# Altium PCB hat_PCB.PcbDoc (part 1 of 2)
Units mm, origin at the board's own origin, x right, y up, seen from the top; angles counter-clockwise.
Board outline 64 x 85 mm, 4 copper layers (Top Side, Ground Plane, Power Plane, Bottom Side), stack 0.844 mm thick; 87 components, 68 nets, 317 pads, 94 vias.
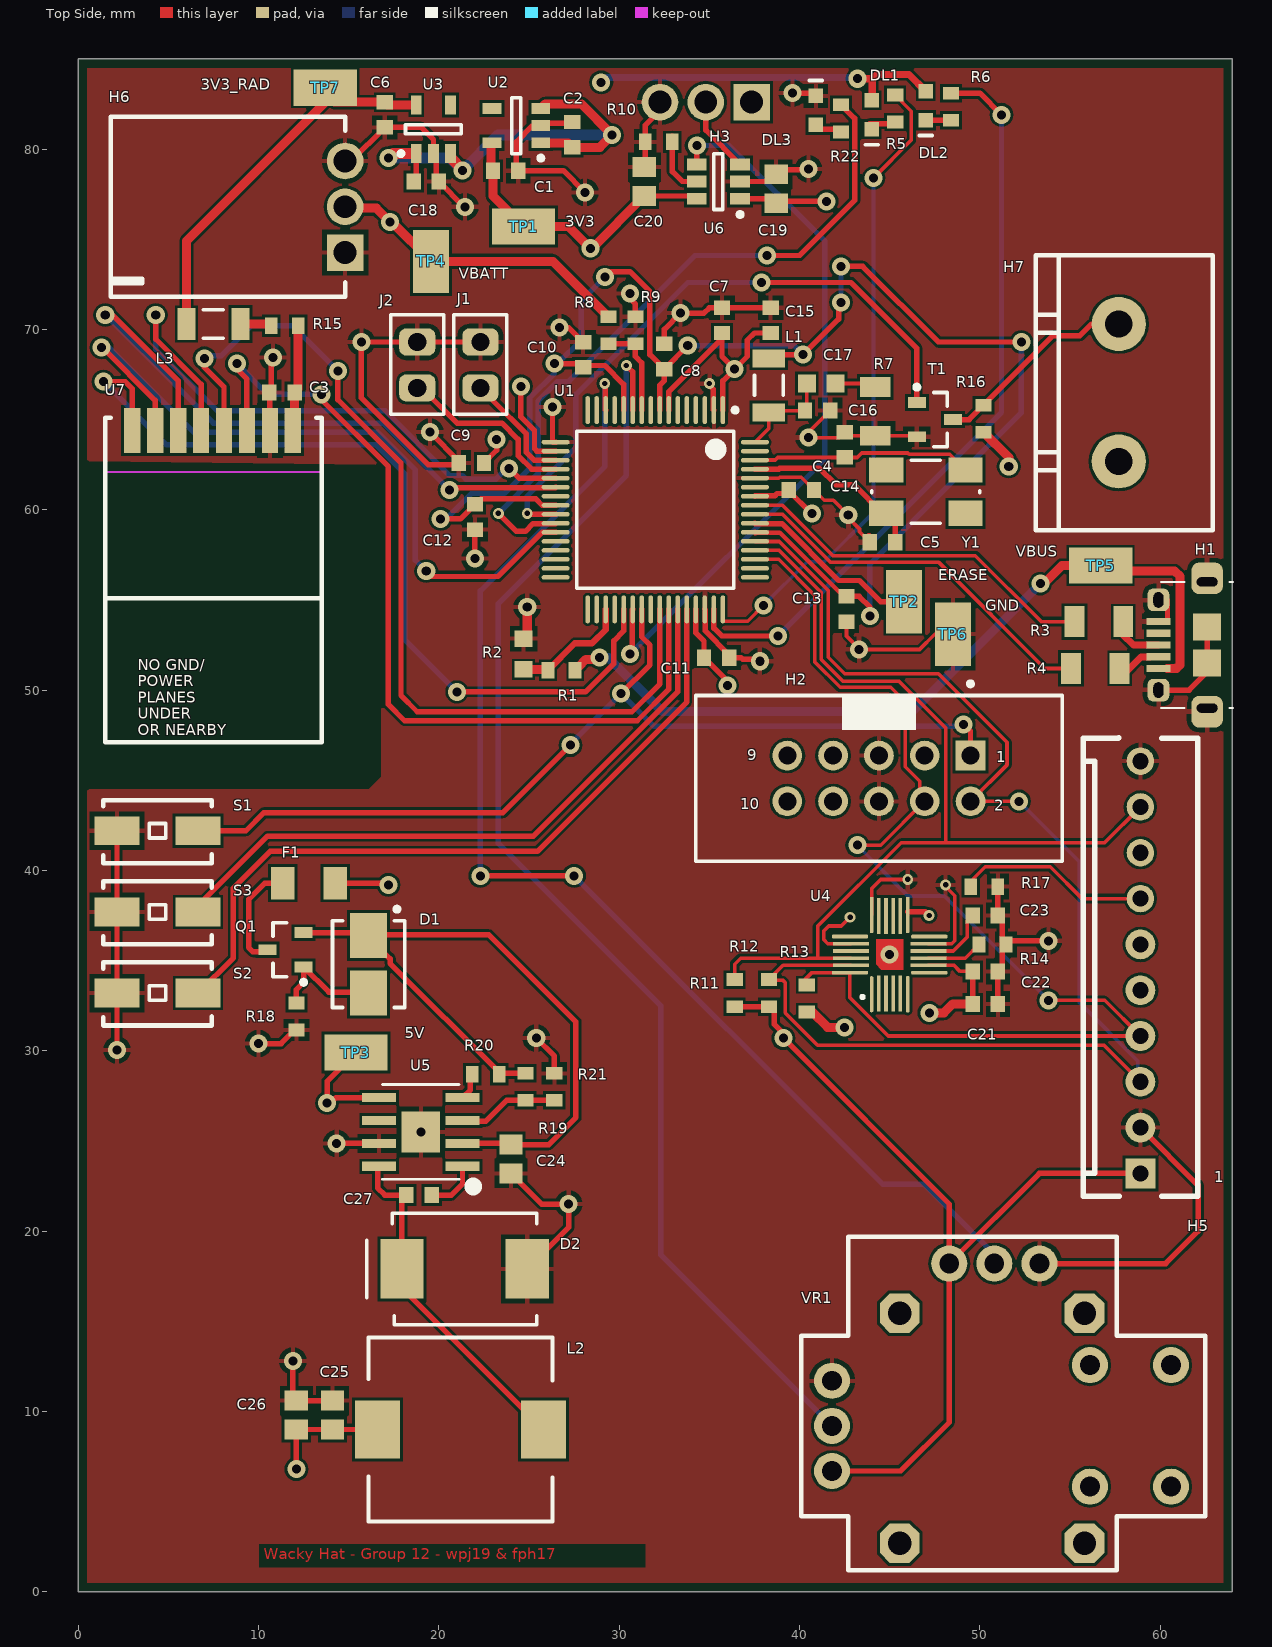
[diagram p0: Top Side view]
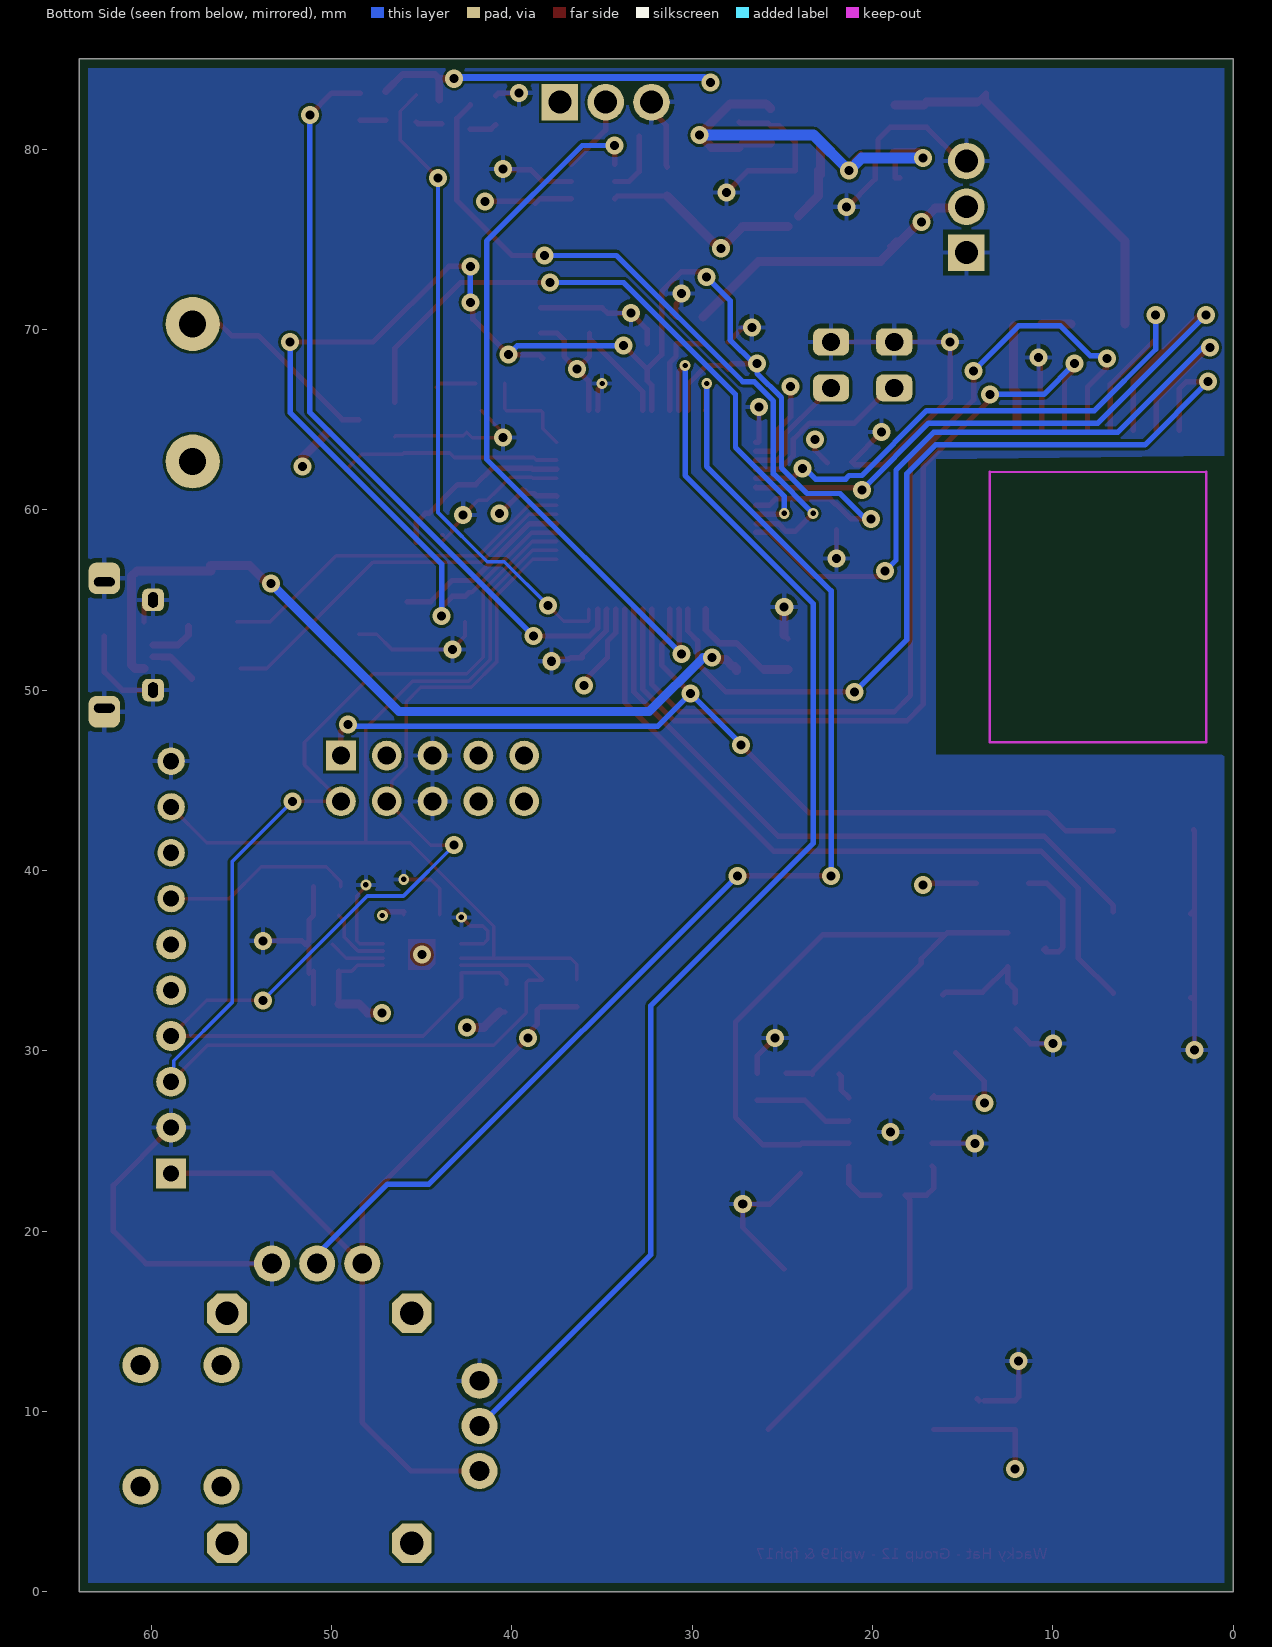
[diagram p1: Bottom Side view, seen from below]
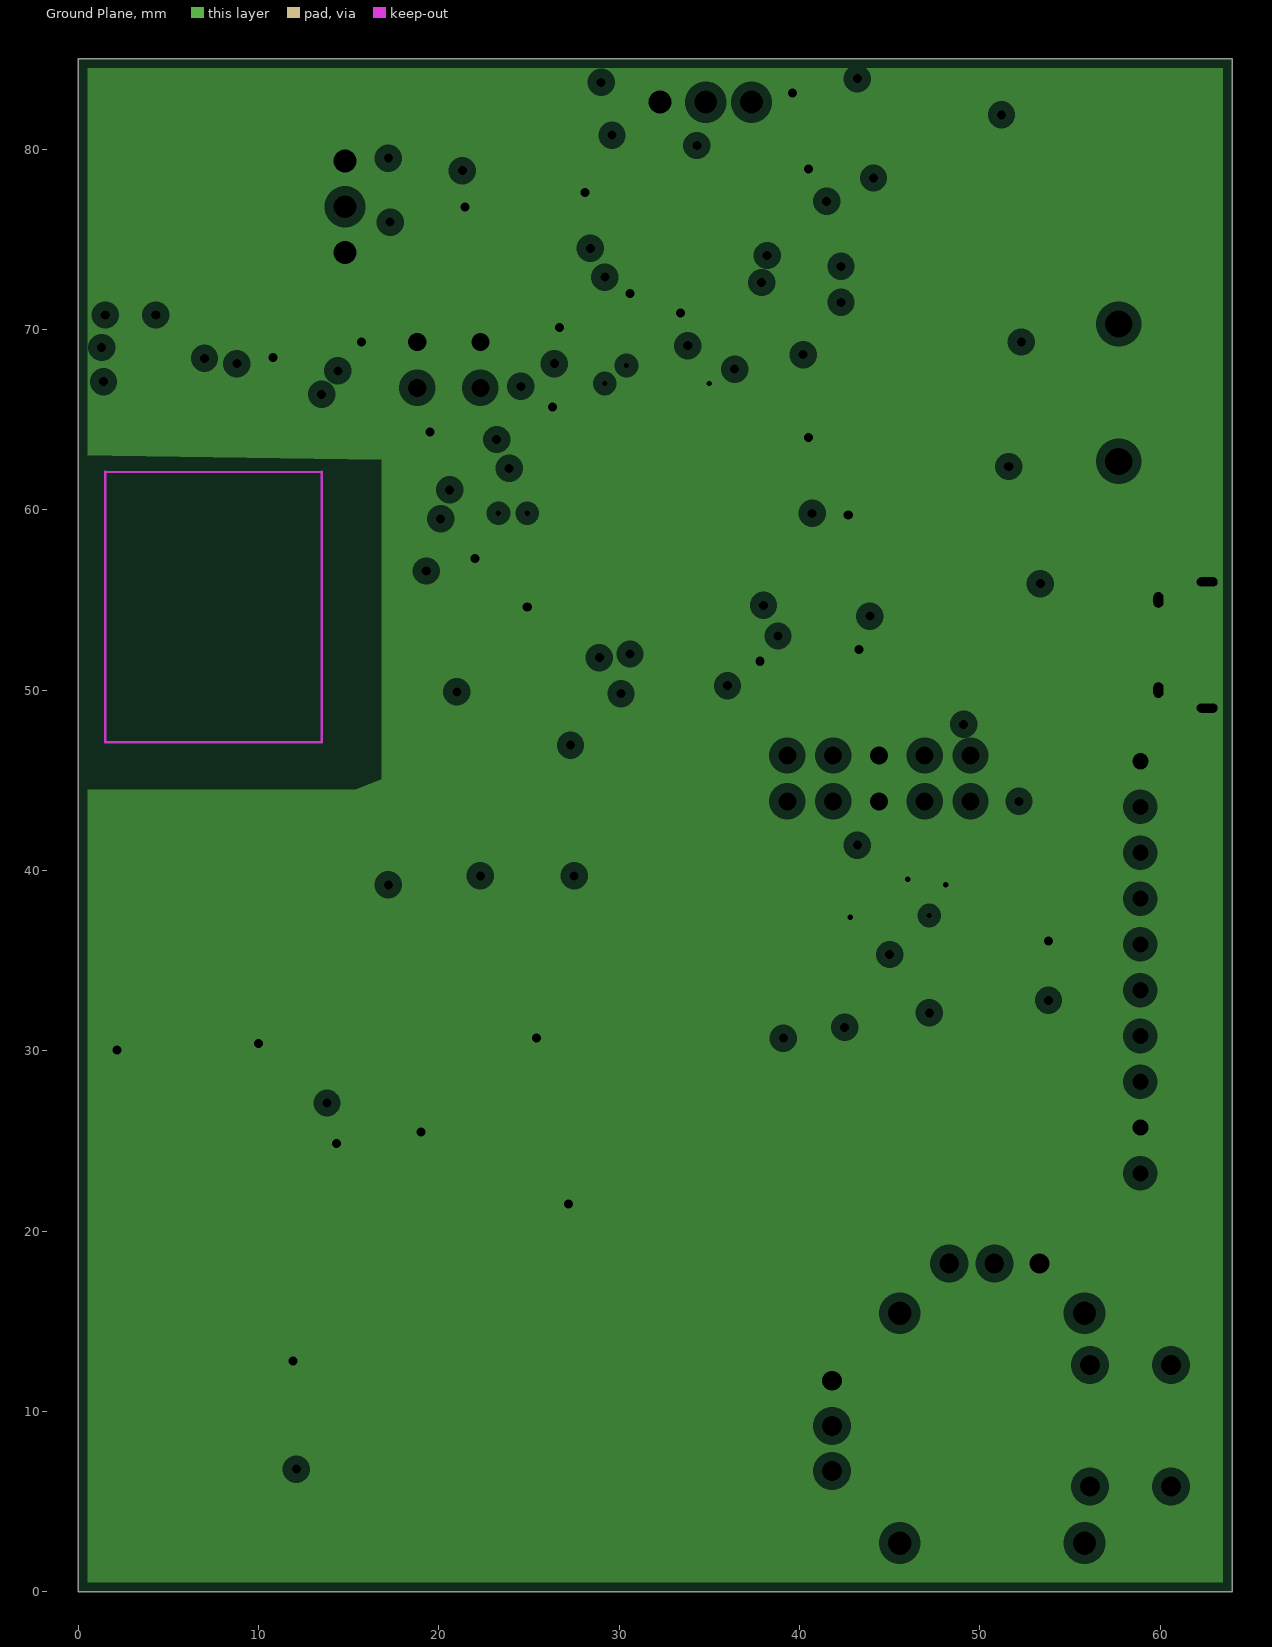
[diagram p2: Ground Plane, clearances drawn from the general rule]
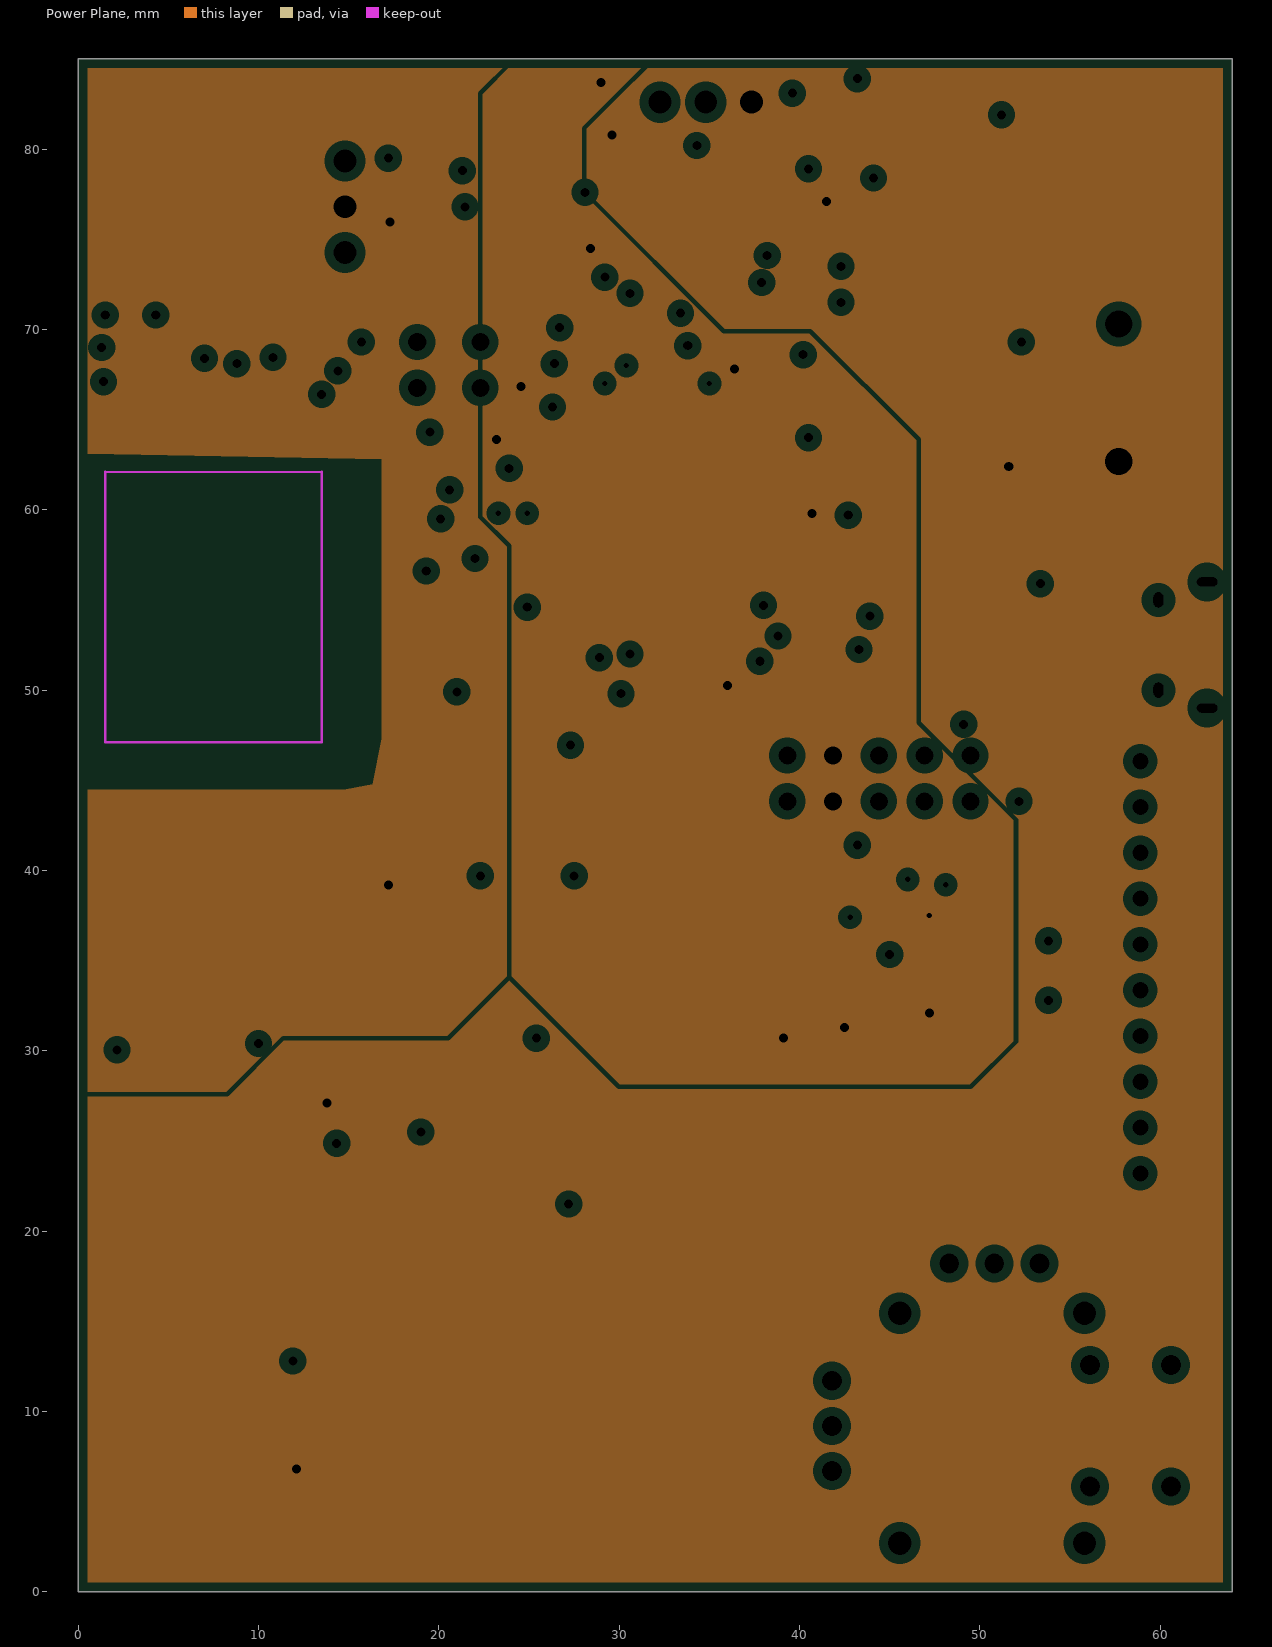
[diagram p3: Power Plane, clearances drawn from the general rule]

## Layer stack, top to bottom
Top Solder: solder mask 0.0102, Solder Resist, Dk 3.5
Top Side: signal copper 0.0356
Dielectric 1: core 0.32, FR-4, Dk 4.8
Ground Plane: plane copper 0.036, net GND
Dielectric 3: prepreg 0.127, Dk 4.2
Power Plane: plane copper 0.036, net (Multiple Nets)
Dielectric 4: core 0.254, Dk 4.2
Bottom Side: signal copper 0.0356
Bottom Solder: solder mask 0.0102, Solder Resist, Dk 3.5

## Board outline
0,85 64,85 64,0 0,0 0,85

## Design rules (kind name [scope] priority, off if disabled: settings)
BoardOutlineClearance [All] p1: gap=0.5 ignorepadtopadclearanceinfootprint=FALSE
Clearance Min_Clearance_Circuit_Labs [All] p1: gap=0.15 ignorepadtopadclearanceinfootprint=FALSE except(0: Arc-Hole Track-Hole SMDPad-Hole THPad-Hole Via-Hole Fill-Hole Poly-Hole Region-Hole Text-Hole)
DiffPairsRouting [All] p1: maxlimit=0.254 minlimit=0.254 mostfreqgap=0.254 toplayer_minwidth=0.381 toplayer_maxwidth=0.381 toplayer_prefwidth=0.381 bottomlayer_minwidth=0.381 bottomlayer_maxwidth=0.381 bottomlayer_prefwidth=0.381 maxuncoupledlength=12.7
FanoutControl Fanout_BGA [IsBGA] p1 off: bgadir=Out bgaviamode=Centered fanoutstyle=Auto fanoutdirection=Alternating viagrid=0.025 // Fanout_BGA (Default Rule)
HoleSize [All] p1: absolutevalues=TRUE maxlimit=10 minlimit=0.3 maxpercent=80.000 minpercent=20.000
MinimumAnnularRing [All] p1: minimumring=0.1
MinimumSolderMaskSliver [All] p1: minsoldermaskwidth=0.1
NetAntennae [All] p1: netantennaetolerance=1
PasteMaskExpansion [All] p1 off: expansion=0.2
PlaneClearance [All] p1: clearance=0.508
PlaneConnect [All] p1: planeconnectstyle=Relief reliefexpansion=0.508 reliefentries=4 reliefconductorwidth=0.254 reliefairgap=0.254
PolygonConnect [All] p1: connectstyle=Relief reliefconductorwidth=0.254 reliefentries=4 polygonreliefangle="90 Angle" airgapwidth=0.254
RoutingVias [All] p1: holewidth=0.5 width=1 viastyle="Through Hole" minholewidth=0.3 minwidth=0.6 maxholewidth=1 maxwidth=2
SMDNeckDown [All] p1 off: percent=50.000
SMDToCorner [All] p1: distance=98425
SMDToPlane [All] p1: distance=1968504
SilkToSolderMaskClearance SilkscreenOverComponentPads [IsPad] p1: minsilkscreentomaskgap=0.254 clearancetoexposedcopper=TRUE
SolderMaskExpansion [All] p1: expansion=0.102
ViasUnderSMD [All] p1: allowed=FALSE
Width [All] p1: maxlimit=2 minlimit=0.15 preferedwidth=0.3
21 further rules are at their usual default settings.

## Classes and differential pairs
component class Radio: C3 H7 L3 R15 R16 T1 U7
component class Power: C24 C25 C26 C27 D1 D2 DL3 F1 H6 L2 Q1 R18 R19 R20 R21 R22 U5
component class MCU: C1 C2 C4 C5 C6 C7 C8 C9 C10 C11 C12 C13 C14 C15 C16 C17 C18 C19 C20 DL1 DL2 H1 H2 H3 J1 J2 L1 R1 R2 R3 R4 R5 R6 R7 R8 R9 R10 S1 S2 S3 TP1 TP2 TP3 TP4 TP5 TP6 TP7 U1 U2 U3 U6 Y1
component class IMU: C21 C22 C23 H5 R11 R12 R13 R14 R17 U4 VR1
differential pair D: +D_P -D_N

## Components (designator, comment, footprint, x,y, rotation, side; value= is the part's Value field where it differs from the comment)
C1 "1uF" CAPC1608L 23.7,78.8 r180 top
C2 "1uF" CAPC1608L 27.4,80.8 r270 top
C3 "10uF" CAPC1608L 11.3,66.5 r0 top
C4 "27pF" CAPC1608L 42.5,63.6 r270 top
C5 "27pF" CAPC1608L 44.6,58.2 r0 top
C6 "1uF" CAPC1608L 17,81.9 r90 top
C7 "100nF" CAPC1608L 35.7,70.5 r270 top
C8 "100nF" CAPC1608L 32.5,68.5 r90 top
C9 "100nF" CAPC1608L 21.8,62.6 r0 top
C10 "100nF" CAPC1608L 28,68.6 r90 top
C11 "100nF" CAPC1608L 35.4,51.8 r180 top
C12 "100nF" CAPC1608L 22,59.6 r270 top
C13 "100nF" CAPC1608L 42.6,54.5 r270 top
C14 "100nF" CAPC1608L 40.1,61.1 r180 top
C15 "100nF" CAPC1608L 38.4,70.5 r270 top
C16 "100nF" CAPC1608L 41,65.5 r180 top
C17 "4.7uF" CAPC1608N 41.2,67 r180 top
C18 "1uF" CAPC1608L 19.3,78.2 r180 top
C19 "10uF" CAPC2012L 38.7,77.8 r270 top
C20 "10uF" CAPC2012L 31.4,78.2 r90 top
C21 "100nF" CAPC1608L 50.3,32.6 r180 top
C22 "10nF" CAPC1608L 50.3,34.4 r180 top
C23 "100nF" CAPC1608L 50.3,37.5 r0 top
C24 "10uF" CAPC2012L 24,24 r90 top
C25 "33uF" CAPC2012L 14.1,9.8 r270 top
C26 "33uF" CAPC2012L 12.1,9.8 r270 top
C27 "100nF" CAPC1608L 18.9,22 r180 top
D1 "DIODE ZENER 5.6V" DO-214AA_SCL 16.1,34.8 r270 top
D2 "SCHOTTKY 30V 4A" SMC 21.425,17.9 r180 top
DL1 "Dark Green" WL-SMCW0603 44,81.1 r90 top
DL2 "Blue" WL-SMCW0603 47,81.6 r90 top
DL3 "Red" WL-SMCW0603 40.9,82.95 r270 top
F1 "2A" RESC3216N 12.8,39.3 r0 top
H1 "JS_USB_MICRO_B" FCI_USB_10118194-0001LF 64.05,52.5 r90 top
H2 "Header 5X2 Vert" IDC2.54-V10D 44.4,45.1 r180 top
H3 "HEADER_3" HEADER_3POS 34.8,82.6 r180 top
H5 "10 Pin Molex KK Hdr" MOLEX_KK_10_HDR 58.9,23.2 r90 top
H6 "Battery_HEADER_3pin" BATT_HEADER_3POS 14.8,76.8 r90 top
H7 "TERM_BLK_2POS" TERM_BLK_2POS 57.7,62.68 r90 top
J1 "100Mil Jumper" JMP2.54 22.3,66.756 r90 top
J2 "100Mil Jumper" JMP2.54 18.8,66.756 r90 top
L1 "1A max, Idc 0.3R," INDC3216L 38.3,66.9 r90 top
L2 "IND 5.2UH 6A" INDUCTOR5u2 21.2,9 r180 top
L3 "1A max, Idc 0.3R," INDC3216L 7.5,70.3 r180 top
Q1 "SSM3J328R,LF" SOT23_L 11.5,35.6 r180 top
R1 "27K" RESC1608L 26.8,51.1 r0 top
R2 "47K" RESC1608N 24.7,52 r270 top
R3 "27R" RESC3216L 56.6,53.8 r180 top
R4 "27R" RESC3216L 56.4,51.2 r180 top
R5 "2K2" RESC1608L 45.3,82.25 r90 top
R6 "2K2" RESC1608L 48.4,82.35 r90 top
R7 "1R" RESC3216L 44.2,65.45 r90 top
R8 "#NAME?" RESC1608L 29.4,69.95 r90 top value=180K
R9 "160K" RESC1608L 30.9,69.95 r90 top
R10 "10K" RESC1608L 32.2,80.4 r0 top
R11 "2K2" RESC1608L 36.4,33.2 r270 top
R12 "2K2" RESC1608L 38.3,33.2 r270 top
R13 "2K2" RESC1608L 40.4,32.9 r270 top
R14 "2K2" RESC1608L 50.7,35.9 r0 top
R15 "10K" RESC1608L 11.45,70.2 r180 top
R16 "10K" RESC1608L 50.2,65.05 r270 top
R17 "10K" RESC1608L 50.25,39.1 r180 top
R18 "100K" RESC1608L 12.1,31.9 r90 top
R19 "56K" RESC1608L 24.8,28 r90 top
R20 "100K" RESC1608L 22.6,28.7 r0 top
R21 "10K" RESC1608L 26.4,28 r270 top
R22 "2K2" RESC1608L 42.3,81.7 r270 top
S1 "EVQPNF05M" EVQPNF05M 4.4,42.2 r180 top
S2 "EVQPNF05M" EVQPNF05M 4.4,33.2 r180 top
S3 "EVQPNF05M" EVQPNF05M 4.4,37.7 r180 top
T1 "BSH105,215" SOT23_L 47.5,65 r0 top
TP1 "3V3" TP_1206 24.7,75.7 r0 top value=TP
TP2 "ERASE" TP_1206 45.8,54.9 r270 top value=TP
TP3 "5V" TP_1206 15.4,29.9 r0 top value=TP
TP4 "VBATT" TP_1206 19.575,73.775 r90 top value=TP
TP5 "VBUS" TP_1206 56.7,56.9 r180 top value=TP
TP6 "GND" TP_1206 48.5,53.1 r270 top value=TP
TP7 "3V3_RAD" TP_1206 13.7,83.4 r0 top value=TP
U1 "ATSAM4S8BA-ANR" LQFP64_L 32,60 r270 top locked
U2 "CAT6219-330TDGT3" SOT95P280X145-5N 24.3,81.3 r180 top
U3 "CAT6219-330TDGT3" SOT95P280X145-5N 19.7,81.1 r90 top
U4 "MPU-9250" QUAD24 43.993,33.985 r90 top locked
U5 "ADP2302ARDZ-5.0 BUCK" RD_8_1 19,25.5 r180 top locked value=Value
U6 "SN74LVC1T45" SOT23-6_N 35.5,78.2 r180 top
U7 "nRF24 SMD" NRF24 13.5,65.1 r180 top
VR1 "Joystick 10k with Sw" Joystick_Sw 41.8,9.2 r180 top
Y1 "12MHz" 6.0X3.5-4 47,61 r0 top

## Footprints (in the part's own frame and the unit in brackets; to place one, negate y for a bottom-side part, rotate by r counter-clockwise, add the part's x,y. Pads: shape width x height; smd on the part's side, far side on the other; paste and mask are expansions set on the pad)
6.0X3.5-4 [mm] "4 SMD 6.0X3.5 mm No Lead Crystal"
  rect 1.9x1.4 smd: 1(-2.2,-1.2) 2(2.2,-1.2) 3(2.2,1.2) 4(-2.2,1.2)
  silkscreen extent -3,-1.75 3,1.75, body extent -3,-1.75 3,1.75, height 1.2
BATT_HEADER_3POS [mil]
  rect 80x80 hole 50: 1(-100,0)
  round 80 hole 50: 2(0,0) 3(100,0)
  silkscreen extent -197,0 197,512
CAPC1608L [mm] "Chip Capacitor, Body 1.6x0.8mm, IPC High Density"
  rect 0.8x0.9 smd: 1(-0.7,0) 2(0.7,0)
  body extent -0.87,-0.48 0.87,0.48, height 0.85
CAPC1608N [mm] "Chip Capacitor, Body 1.6x0.8mm, IPC Medium Density"
  rect 1x1 smd: 1(-0.8,0) 2(0.8,0)
  body extent -0.87,-0.48 0.87,0.48, height 0.85
CAPC2012L [mm] "Chip Capacitor, Body 2.0x1.3mm, IPC High Density"
  rect 1.1x1.3 smd: 1(-0.8,0) 2(0.8,0)
  body extent -1.1,-0.72 1.1,0.72, height 1.1
DO-214AA_SCL [mm] "Molded Diode, 2-Leads, Body 4.40x3.62mm, IPC Medium Density"
  rect 2.5x2.05 smd: 1(-1.6,0) 2(1.6,0)
  silkscreen extent -3.17,-2 2.4,2
EVQPNF05M [mm] "Panansonic light touch SMD push button switch"
  rect 2.5x1.6 smd: 1(-2.25,0) 2(2.25,0)
  silkscreen extent -3,-1.7 3,1.8, body extent -3,-1.7 3,1.8, height 5
FCI_USB_10118194-0001LF [mm] "Micro USB B Type Receptacle"
  rect 0.4x1.35 smd mask+0.07: 1(-1.3,4.15) 2(-0.65,4.15) 3(0,4.15) 4(0.65,4.15) 5(1.3,4.15)
  rrect50% 1.75x1.75 hole 0.5 slot 1.15 at 90 deg copper offset -0.2,0 paste+0 mask+0.1: 6(-3.5,1.45)
  rrect50% 1.25x1.2 hole 0.55 slot 0.85 at 0 deg: 6(-2.5,4.15) 6(2.5,4.15)
  rect 1.5x1.55 smd: 6(-1,1.45) 6(1,1.45)
  rrect50% 1.75x1.75 hole 0.5 slot 1.15 at 90 deg copper offset 0.2,0 paste+0 mask+0.1: 6(3.5,1.45)
  silkscreen extent -3.5,0 3.5,4
HEADER_3POS [mil]
  rect 80x80 hole 50: 1(-100,0)
  round 80 hole 50: 2(0,0) 3(100,0)
IDC2.54-V10D [mm] "Connector; IDC, Low Profile Male Header, Thru-Hole; 10 Position; Vertical; Pitch 2.54 mm; Body 20.32 x 9.2 x 9.45 mm (LxWxH)"
  rect 1.65x1.65 hole 1: 1(-5.08,-1.27)
  round 1.65 hole 1: 2(-5.08,1.27) 3(-2.54,-1.27) 4(-2.54,1.27) 5(0,-1.27) 6(0,1.27) 7(2.54,-1.27) 8(2.54,1.27) 9(5.08,-1.27) 10(5.08,1.27)
  silkscreen extent -10.16,-5.37 10.16,4.6, body extent -10.16,-4.6 10.16,4.6, height 9.45
INDC3216L [mm] "Chip Inductor, Body 3.2x1.6mm, IPC High Density"
  rect 1x1.8 smd: 1(-1.5,0) 2(1.5,0)
  silkscreen extent -0.55,-0.8 0.55,0.8, body extent -1.75,-0.95 1.75,0.95, height 1.9
INDUCTOR5u2 [mm]
  rect 2.5x3.2 smd: 1(-4.6,0) 2(4.6,0)
  silkscreen extent -5.1,-5.1 5.1,5.1
JMP2.54 [mm] "Jumper Change over 2.54mm"
  rrect50% 1.5x2 hole 1: 1(0,0) 2(2.544,0)
  silkscreen extent -1.47,-1.47 4.05,1.47, body extent -1.43,-1.43 4.05,1.43, height 8.45
Joystick_Sw [mm]
  round 2 hole 1.1: 1(0,2.5) 2(0,0) 3(0,-2.5) 4(-6.5,-9) 5(-9,-9) 6(-11.5,-9) 7(-14.3,-3.37) 8(-18.8,-3.37) 9(-18.8,3.37) 10(-14.3,3.37)
  oct 2.2x2.2 hole 1.3: 11(-14,-6.25) 12(-3.75,-6.25) 13(-14,6.5) 14(-3.75,6.5)
  silkscreen extent -20.7,-10.5 1.7,8
LQFP64_L [mm] "Thin QFP, 64-Leads, Body 10x10mm, Pitch 0.5mm, IPC High Density"
  oval 1.55x0.25 smd mask+0.07: 1(-5.525,3.75) 2(-5.525,3.25) 3(-5.525,2.75) 4(-5.525,2.25) 5(-5.525,1.75) 6(-5.525,1.25) 7(-5.525,0.75) 8(-5.525,0.25) 9(-5.525,-0.25) 10(-5.525,-0.75) 11(-5.525,-1.25) 12(-5.525,-1.75) 13(-5.525,-2.25) 14(-5.525,-2.75) 15(-5.525,-3.25) 16(-5.525,-3.75) 33(5.525,-3.75) 34(5.525,-3.25) 35(5.525,-2.75) 36(5.525,-2.25) 37(5.525,-1.75) 38(5.525,-1.25) 39(5.525,-0.75) 40(5.525,-0.25) 41(5.525,0.25) 42(5.525,0.75) 43(5.525,1.25) 44(5.525,1.75) 45(5.525,2.25) 46(5.525,2.75) 47(5.525,3.25) 48(5.525,3.75)
  oval 0.25x1.55 smd mask+0.07: 17(-3.75,-5.525) 18(-3.25,-5.525) 19(-2.75,-5.525) 20(-2.25,-5.525) 21(-1.75,-5.525) 22(-1.25,-5.525) 23(-0.75,-5.525) 24(-0.25,-5.525) 25(0.25,-5.525) 26(0.75,-5.525) 27(1.25,-5.525) 28(1.75,-5.525) 29(2.25,-5.525) 30(2.75,-5.525) 31(3.25,-5.525) 32(3.75,-5.525) 49(3.75,5.525) 50(3.25,5.525) 51(2.75,5.525) 52(2.25,5.525) 53(1.75,5.525) 54(1.25,5.525) 55(0.75,5.525) 56(0.25,5.525) 57(-0.25,5.525) 58(-0.75,5.525) 59(-1.25,5.525) 60(-1.75,5.525) 61(-2.25,5.525) 62(-2.75,5.525) 63(-3.25,5.525) 64(-3.75,5.525)
  silkscreen extent -5.65,-4.35 4.35,4.55, body extent -5,-5 5,5, height 1.6
MOLEX_KK_10_HDR [mil] "MOLEX_KK_10_HDR"
  rect 65x65 hole 35.43: 1(0,0)
  round 65 hole 35.43: 2(100,0) 3(200,0) 4(300,0) 5(400,0) 6(500,0)
  round 60 hole 35.43: 7(600,0) 8(700,0) 9(800,0) 10(900,0)
  silkscreen extent -50,-125 951,125, body extent -44,-120 944,120, height 630
NRF24 [mm]
  rect 0.9x2.5 smd: 1(1.6,0.7) 2(2.871,0.7) 3(4.143,0.7) 4(5.414,0.7) 5(6.686,0.7) 6(7.957,0.7) 7(9.229,0.7) 8(10.5,0.7)
  Keep-Out Layer lines w0.1: 12,3 0,3
  Keep-Out Layer lines w0.15: 12,3 12,18 0,18 0,3
  silkscreen extent 0,0 12,18
QUAD24 [mm]
  oval 2x0.2 smd paste+0.02 mask+0.015: 1(-0.85,0)
  rect 2x0.2 smd paste+0.02 mask+0.015: 2(-0.8,-0.4) 3(-0.8,-0.8) 4(-0.8,-1.2) 5(-0.8,-1.6) 14(3.5,-1.6) 15(3.5,-1.2) 16(3.5,-0.8) 17(3.5,-0.4)
  rrect50% 2x0.2 smd paste+0.02 mask+0.015: 6(-0.85,-2) 13(3.55,-2) 18(3.55,0)
  rrect50% 0.2x2 smd paste+0.02 mask+0.015: 7(0.35,-3.2) 12(2.35,-3.2) 19(2.35,1.2) 24(0.35,1.2)
  rect 0.2x2 smd paste+0.02 mask+0.015: 8(0.75,-3.15) 9(1.15,-3.15) 10(1.55,-3.15) 11(1.95,-3.15) 20(1.95,1.15) 21(1.55,1.15) 22(1.15,1.15) 23(0.75,1.15)
  Top Side region: 0.5,-1.75 0.5,-0.55 0.8,-0.25 2.2,-0.25 2.2,-1.75
  silkscreen extent -1.05,0.45 -0.95,0.55
RD_8_1 [mil]
  rect 74x20 smd paste+0 mask+0: 1(-91,75) 2(-91,25) 3(-91,-25) 4(-91,-75) 5(91,-75) 6(91,-25) 7(91,25) 8(91,75)
  rect 84.65x90 smd paste-44.5 mask+0: EPAD(0,0)
  silkscreen extent -118,-104 84,123, body extent 0,0 10,10, height 10
RESC1608L [mm] "Chip Resistor, Body 1.6x0.8mm, IPC High Density"
  rect 0.7x0.9 smd: 1(-0.75,0) 2(0.75,0)
  body extent -0.85,-0.48 0.85,0.48, height 0.9
RESC1608N [mm] "Chip Resistor, Body 1.6x0.8mm, IPC Medium Density"
  rect 0.9x1 smd: 1(-0.85,0) 2(0.85,0)
  body extent -0.85,-0.48 0.85,0.48, height 0.6
RESC3216L [mm] "Chip Resistor, Body 3.1x1.6mm, IPC High Density"
  rect 1.1x1.7 smd: 1(-1.35,0) 2(1.35,0)
  body extent -1.68,-0.87 1.68,0.87, height 2.54
RESC3216N [mm] "Chip Resistor, Body 3.2x1.6mm, IPC Medium Density"
  rect 1.3x1.8 smd: 1(-1.45,0) 2(1.45,0)
  body extent -1.68,-0.87 1.68,0.87, height 0.71
SMC [mm] "DO-214-AB/SMC; 2 C-Bend Leads; Body 7.9 x 5.9 mm, inc. leads (LxW)"
  rect 2.4x3.3 smd: 1(-3.475,0) 2(3.475,0)
  silkscreen extent -4,-3.1 5.43,3.1
SOT23-6_N [mm]
  rect 1.1x0.65 smd: 1(-1.2,0.95) 2(-1.2,0) 3(-1.2,-0.95) 4(1.2,-0.95) 5(1.2,0) 6(1.2,0.95)
  silkscreen extent -1.33,-1.55 0.25,1.95, body extent -0.9,-1.55 0.9,1.55, height 1.45
SOT23_L [mm] "SOT23, 3-Leads, Body 2.9x1.3mm, Pitch 0.95mm, Lead Span 2.3mm, IPC High Density"
  rect 1x0.6 smd: 1(-1,0.95) 2(-1,-0.95) 3(1,0)
  silkscreen extent -1.13,-1.5 0.7,1.92, body extent -0.7,-1.5 0.7,1.5, height 1.1
SOT95P280X145-5N [mm] "SOT23, 5-Leads, Body 2.90x2.80mm, Pitch 0.95mm, IPC Medium Density"
  rect 1.05x0.6 smd: 1(-1.35,0.95) 2(-1.35,0) 3(-1.35,-0.95) 4(1.35,-0.95) 5(1.35,0.95)
  silkscreen extent -1.48,-1.55 0.25,1.92, body extent -0.87,-1.52 0.87,1.53, height 1.45
TERM_BLK_2POS [mm]
  round 3 hole 1.5: 1(0,0) 2(7.62,0)
  silkscreen extent -3.81,-5.2 11.43,4.6
TP_1206 [mm] "Test Point Pad"
  rect 3.5x2 smd: 1(0,0)
  body extent -1.62,-0.85 1.63,0.8, height 2
WL-SMCW0603 [mm] "2.4 x 0.8 x 0.7mm LED"
  rect 0.8x0.8 smd: 1(0,0) 2(1.6,0)
  silkscreen extent -0.85,-0.35 -0.85,0.35

## Part data
C1 C2 C6 C18: library part CC_1uF_0603, "CAP CER 1uF Y5V -20% +80% 16V 0603", Max Voltage=16V, Code_IPC="1608 [0603]", PackageReference=0603, Storage Location="PCB Assembly WS", Supplier="ECE Dept"
C3: library part CC_10uF_0603, "CAP CER 10UF X5R +-20% 6V3 0603", Voltage - Rated=6.3V, Storage Location="PCB Assembly WS", Supplier="ECE Dept"
C4 C5: library part CC_27pF_0603, "CAP CER 27pF NPO/COG +-5% 50V 0603", Code_IPC="1608 [0603]", PackageReference=0603, Storage Location="PCB Assembly WS", Supplier="ECE Dept"
C7 C8 C9 C10 C11 C12 C13 C14 C15 C16 C21 C23 C27: library part CC_100nF_0603, "CAP CER 100nF X7R +-10% 50V 0603", Code_IPC="1608 [0603]", PackageReference=0603, Storage Location="PCB Assembly WS", Supplier="ECE Dept"
C17: library part CC_4.7uF_0603, "CAP CER 4.7uF X5R +-20%  10V 0603", Max Voltage=10V, Code_IPC=2012[0805], Note="Footprint corresponds to dimensions for bulk cassette packaging. This case size has tightened tolerances.", PackageReference=0805, Storage Location="PCB Assembly WS", Supplier="ECE Dept"
C19 C20 C24: library part CC_10uF_16V_0805, "CAP CER 10uF X5R 16V 0805", Manufacturer="Samsung Electro-Mechanics", Manufacturer Part Number=CL21A106KOQNNWE, Max Voltage=16V, Operating Temperature="-55°C ~ 85°C", Package / Case="0805 (2012 Metric)", Ratings=-, Supplier Part Number 1=1276-2894-1-ND, Temperature Coefficient=X5R, Tolerance=±10%, Applications="General Purpose", Category=Capacitors, Code_IPC=2012[0805], ComponentLink1Description=http://www.samsungsem.com/kr/support/product-search/mlcc/CL21A106KOQNNWE.jsp, ComponentLink1URL=http://www.samsungsem.com/kr/support/product-search/mlcc/CL21A106KOQNNWE.jsp, Features=-, Height - Seated (Max)=-, Lead Spacing=-, Lead Style=-, Mounting Type="Surface Mount, MLCC", Note="Footprint corresponds to dimensions for bulk cassette packaging. This case size has tightened tolerances.", Notification="Current market demand for these product types have resulted in fluctuating and extending lead times. Lead times may differ.", PackageReference=0805, Packaging="Cut Tape (CT)", Part Status=Active, Pricing 1="1=0.35, 10=0.25, 100=0.1178, 500=0.08254, 1000=0.06831 (NZD)", RoHS="RoHS Compliant", Size / Dimension="0.079\" L x 0.049\" W (2.00mm x 1.25mm)", Stock 1=20000, Supplier 1=Digi-Key, Thickness (Max)="0.055\" (1.40mm)", Voltage - Rated=16V
C22: library part CC_10nF_0603, "CAP CER 10nF X7R +-10% 50V 0603", Code_IPC="1608 [0603]", PackageReference=0603, Storage Location="PCB Assembly WS", Supplier="ECE Dept"
C25 C26: library part CC_33uF_6V3_0805, "CAP CER 33uF X5R 6V3 0805", Manufacturer="TDK Corporation", Manufacturer Part Number=C2012X5R0J336M125AC, Operating Temperature="-55°C ~ 85°C", Package / Case="0805 (2012 Metric)", Ratings=-, Supplier Part Number 1=445-5986-1-ND, Temperature Coefficient=X5R, Tolerance=±20%, Voltage - Rated=6.3V, Applications="General Purpose", Category=Capacitors, ComponentLink1Description=https://product.tdk.com/info/en/catalog/datasheets/mlcc_commercial_general_en.pdf, ComponentLink1URL=https://product.tdk.com/info/en/catalog/datasheets/mlcc_commercial_general_en.pdf, Failure Rate=-, Features="Low ESL", Height - Seated (Max)=-, Lead Spacing=-, Lead Style=-, Mounting Type="Surface Mount, MLCC", Notification="Current market demand for these product types have resulted in fluctuating and extending lead times. Lead times may differ.", Packaging="Cut Tape (CT)", Part Status=Active, Pricing 1="1=1.65, 10=1.262, 100=0.9023, 500=0.6985, 1000=0.60149 (NZD)", RoHS="RoHS Compliant", Size / Dimension="0.079\" L x 0.049\" W (2.00mm x 1.25mm)", Stock 1=20000, Supplier 1=Digi-Key, Thickness (Max)="0.057\" (1.45mm)"
D1: library part SMBJ5339B-TP, "DIODE ZENER 5.6V 5W DO214AA", Base Part Number=SMBJ5339, Manufacturer="Micro Commercial Co", Operating Temperature="-55°C ~ 150°C", Package / Case="DO-214AA, SMB", Supplier Device Package="DO-214AA (SMB)", Supplier Part Number 1=SMBJ5339B-TPMSCT-ND, Tolerance=±5%, Category="Discrete Semiconductor Products", ComponentLink1Description=http://www.mccsemi.com/up_pdf/SMBJ5338B-SMBJ5388B(SMB).pdf, ComponentLink1URL=http://www.mccsemi.com/up_pdf/SMBJ5338B-SMBJ5388B(SMB).pdf, Manufacturer Part Number=SMBJ5339B-TP, Mounting Type="Surface Mount", Packaging="Cut Tape (CT)", Part Status=Active, Pricing 1="1=1.47, 10=1.277, 25=1.1312, 100=0.9853, 250=0.85764, 500=0.72988, 1000=0.58391 (NZD)", RoHS="RoHS Compliant", Stock 1=85990, Supplier 1=Digi-Key
D2: library part MBRS330T3G, "DIODE SCHOTTKY 30V 4A SMC", Base Part Number=MBRS330, Capacitance @ Vr, F=-, Current - Average Rectified (Io)=4A, Manufacturer="ON Semiconductor", Operating Temperature - Junction="-65°C ~ 150°C", Package / Case="DO-214AB, SMC", Supplier Device Package=SMC, Supplier Part Number 1=MBRS330T3GOSCT-ND, Category="Discrete Semiconductor Products", ComponentLink1Description=http://www.onsemi.com/pub/Collateral/MBRS340T3-D.PDF, ComponentLink1URL=http://www.onsemi.com/pub/Collateral/MBRS340T3-D.PDF, Diode Type=Schottky, Manufacturer Part Number=MBRS330T3G, Mounting Type="Surface Mount", Packaging="Cut Tape (CT)", Part Status=Active, Pricing 1="1=0.93, 10=0.79, 100=0.5902, 500=0.46368, 1000=0.35829 (NZD)", RoHS="RoHS Compliant", Speed="Fast Recovery =< 500ns, > 200mA (Io)", Stock 1=8919, Supplier 1=Digi-Key
DL1: library part DL_150060GS75000, "LED Dk Green 430mcd 0603 SMD", Forward Current If=30, Forward Voltage=3.2, Manufacturer="WURTH ELEKTRONIK", Manufacturer Part Number=150060GS75000, Supplier Part Number 1=2322070, LED Colour="Dark Green", LED Mounting=SMD, Lens Shape=Rectangular, Luminous Intensity=430, Storage Location="PCB Assembly WS", Supplier="ECE Dept", Supplier 1=Farnell, Viewing Angle=140°, Wavelength Typ=520
DL2: library part DL_150060BS75000, "LED Blue 270mcd 0603 SMD", Forward Current If=30, Forward Voltage=3.2, Manufacturer="WURTH ELEKTRONIK", Manufacturer Part Number=150060BS75000, Supplier Part Number 1=2322069, LED Colour=Blue, Luminous Intensity=270, Pricing="1=0.3844, 50=0.3252, 100=0.2957, 500=0.2365 (NZD)", Storage Location="PCB Assembly WS", Supplier="ECE Dept", Supplier 1=Farnell, Viewing Angle=120°, Wavelength Typ=470
DL3: library part DL_150060RS75000, "LED Red 250mcd 0603 SMD", Forward Current If=30, Forward Voltage=2, Manufacturer="WURTH ELEKTRONIK", Manufacturer Part Number=150060RS75000, Supplier Part Number 1=2322071, LED Colour=Red, LED Mounting=SMD, Lens Shape=Rectangular, Luminous Intensity=250, Storage Location="PCB Assembly WS", Supplier="ECE Dept", Supplier 1=Farnell, Viewing Angle=140°, Wavelength Typ=625
F1: library part FS_Fuse_2.0A, "Fuse 2.0A Very Fast Acting 1206 SMD", Manufacturer=MULTICOMP, Manufacturer Part Number="MC12CF 002", Supplier Part Number 1=1841029, Manufacturer PN="MC12CF 002", Storage Location="PCB Assembly WS", Supplier="ECE Dept", Supplier 1=Farnell
H1: library part JS_USB_MICRO_B_SMT, "CONN USB MICRO B RECPT SMT R/A", Manufacturer=FCI, Manufacturer Part Number=10118194-0001LF, Supplier Part Number 1=609-4618-1-ND, Features="Shielded, Solder Retention", Gender=Receptacle, Mounting Type="Surface Mount, Right Angle, Horizontal", Number of Contacts=5, Specifications="USB 2.0", Supplier 1=Digi-Key
H2: library part JA_HDR_IDC_5X2_VERT, "IDC Header, 2,54mm, 10-Pin, Vert", Supplier Part Number 1=1096985, Storage Location="ECE Dept Store", Supplier="ECE Dept", Supplier 1=Farnell
H3 H6: "3Pin Header 2.54mm spacing"
H5: library part JA_MOLEX_KK_10POS, "CONN HEADER 10POS 2.54mm VERT_ Thru Hole", Supplier Part Number 1=1756828, Storage Location="ECE Dept Store", Supplier="ECE Dept", Supplier 1=Farnell
H7: "2 Position Terminal Block 7.62mm spacing"
J1 J2: library part TP_JUMPER, "2.54mm Jumper Thru Hole", Supplier Part Number 1=1097975, No. of Positions=2, No. of Rows=1, Pitch Spacing=2.54, Storage Location="ECE$ Store", Supplier="ECE Dept", Supplier 1=Farnell
L1 L3: library part IN_Ferrite-Bead, "Ferrite Bead, Rdc 0.3R, Z100MHZ 600R, Imax 1A, SMD 1206", DC Current Rating=1, DC Resistance Max=0.08, Ferrite Case Style="1206 ^3216 Metric]", Frequency Range="50MHz to 1", Impedance Tolerance="± 25%", Manufacturer=FAIR-RITE, Manufacturer Part Number=2512066017Y1, Supplier Part Number 1=1612060, Ferrite Mounting=SMD, Impedance=600, Manufacturer PN=2512066017Y1, Storage Location="PCB Assembly WS", Supplier="ECE Dept", Supplier 1=Farnell
L2: library part CDRH104RNP-5R2NC, "FIXED IND 5.2UH 6A 22 MOHM SMD", Current - Saturation=5.6A, DC Resistance (DCR)="22 mOhm Max", Frequency - Self Resonant=-, Manufacturer="Sumida America Components Inc.", Operating Temperature="-40°C ~ 100°C", Package / Case=Nonstandard, Supplier Part Number 1=308-2280-1-ND, Tolerance=±30%, Category="Inductors, Coils, Chokes", ComponentLink1Description=http://products.sumida.com/products/pdf/CDRH104R.pdf, ComponentLink1URL=http://products.sumida.com/products/pdf/CDRH104R.pdf, Height - Seated (Max)="0.157\" (4.00mm)", Manufacturer Part Number=CDRH104RNP-5R2NC, Material - Core=Ferrite, Mounting Type="Surface Mount", Packaging="Cut Tape (CT)", Part Status=Active, Pricing 1="1=2.9, 10=2.678, 100=1.8743, 500=1.5173 (NZD)", Q @ Freq=-, Ratings=-, RoHS="RoHS Compliant", Shielding=Shielded, Size / Dimension="0.402\" L x 0.394\" W (10.20mm x 10.00mm)", Stock 1=3849, Supplier 1=Digi-Key, Supplier Device Package=-, Type=-
Q1: library part TM_SSM3J328R, "MOSFET P-CH 20V 6A SOT23-3", Case/Package=SOT-23-3, Continuous Drain Current (ID)=6A, Drain to Source Breakdown Voltage=-20V, Drain to Source Resistance=47.4mR, Drain to Source Voltage (Vdss)=20V, Gate to Source Voltage (Vgs)=8V, Input Capacitance=840pF, Input Capacitance (Ciss) @ Vds="840pF @ 10V", Manufacturer=Toshiba, Max Operating Temperature=150°C, Max Power Dissipation=1W, Min Operating Temperature=-55°C, Package / Case="SOT-23-3 Flat Leads", Package Quantity=3000, Power Dissipation=2W, Supplier Device Package=SOT-23F, Supplier Part Number=SSM3J328RLFDKR-ND, ComponentLink1Description=https://datasheet.ciiva.com/11158/ssm3j328r-datasheet-en-20140301-11158652.pdf, ComponentLink1URL=https://datasheet.ciiva.com/11158/ssm3j328r-datasheet-en-20140301-11158652.pdf, Current - Continuous Drain (Id) @ 25° C=6A, Element Configuration=Single, FET Feature="Logic Level Gate, 1.5V Drive", FET Type="MOSFET P-Channel, Metal Oxide", Gate Charge (Qg) @ Vgs="12.8nC @ 4.5V", Manufacturer Part Number=SSM3J328R,LF, Mount="Surface Mount", Number of Channels=1, Number of Elements=1, Number of Pins=3, Packaging="Tape and Reel", Power - Max=1W, Pricing="1=0.79, 10=0.658, 25=0.5772, 100=0.4939, 250=0.42836, 500=0.36284, 1000=0.27972 (NZD)", Radiation Hardening=No, Rds On Max=29.8mR, Storage Location="PCB Assembly WS", Supplier=Digi-Key, Supplier 1=Digi-Key, Supplier Part Number 1=SSM3J328RLFDKR-ND, Turn-Off Delay Time=107ns, Turn-On Delay Time=32ns, Vgs(th) (Max) @ Id="1V @ 1mA"
R1: library part RS_27K, "RES 27K OHM 1/10W 5% 0603 SMD", Storage Location="PCB Assembly WS", Supplier="ECE Dept"
R2: library part RS_47K, "RES 47.0K OHM 1/10W 5% 0603 SMD", Storage Location="PCB Assembly WS", Supplier="ECE Dept"
R3 R4: library part RT_27R, "RES 27R OHM 1/4W 5% 1206 SMD", Storage Location="PCB Assembly WS", Supplier="ECE Dept"
R5 R6 R11 R12 R13 R14 R22: library part RS_2K2, "RES 2.2K OHM 1/10W 5% 0603 SMD", Storage Location="PCB Assembly WS", Supplier="ECE Dept"
R7: library part RT_1R, "RES 1R OHM 1/4W 5% 1206 SMD", Storage Location="PCB Assembly WS", Supplier="ECE Dept"
R8: library part RS_180K, "RES 180K OHM 1/10W 5% 0603 SMD", Storage Location="PCB Assembly WS", Supplier="ECE Dept"
R9: library part RS_160K, "RES 160K OHM 1/10W 5% 0603 SMD", Storage Location="PCB Assembly WS", Supplier="ECE Dept"
R10 R15 R16 R17 R21: library part RS_10K, "RES 10.0K OHM 1/10W 5% 0603 SMD", Storage Location="PCB Assembly WS", Supplier="ECE Dept"
R18 R20: library part RS_100K, "RES 100K OHM 1/10W 5% 0603 SMD", Storage Location="PCB Assembly WS", Supplier="ECE Dept"
R19: library part RS_56K, "RES 56.0K OHM 1/10W 5% 0603 SMD", Storage Location="PCB Assembly WS", Supplier="ECE Dept"
S1 S2 S3: library part WS_EVQPNF05M, "Panasonic 6 x 3.5mm SMD Light Touch Switch Type SMD", Manufacturer=Panasonic, Supplier Part Number 1=2079481, Manufacturer PN=EVQPNF05M, PackageDescription="6.0 x 3.5 mm", Storage Location="PCB Assembly WS", Supplier="ECE Dept", Supplier 1=Farnell, Supplier 2=Digi-Key, Supplier Part Number 2=P13598SCT-ND
T1: library part TM_BSH105, "MOSFET N-CH 20V 1.05A SOT-23", Current - Continuous Drain (Id) @ 25° C=1.05A, Drain to Source Voltage (Vdss)=20V, Input Capacitance (Ciss) @ Vds="152pF @ 16V", Manufacturer="NXP Semiconductors", Package / Case="TO-236-3, SC-59, SOT-23-3", Power - Max=417mW, Supplier Part Number 1=1758066, FET Type="MOSFET N-Channel, Metal Oxide", Gate Charge (Qg) @ Vgs="3.9nC @ 4.5V", Manufacturer Part Number=BSH105,215, Pricing="1=0.53, 10=0.42, 25=0.3544, 100=0.2885, 250=0.23896, 500=0.1974, 1000=0.14785 (NZD)", Rds On (Max) @ Id, Vgs="200 mOhm @ 600mA, 4.5V", Storage Location="PCB Assembly WS", Supplier="ECE Dept", Supplier 1=Farnell, Supplier 2=Digi-Key, Supplier Part Number 2=568-6215-1-ND
TP1 TP2 TP3 TP4 TP5 TP6 TP7: library part TP_1206, "Test-Point 3.3x1.6x2.1mm SMD", Manufacturer="Harwin Inc", Manufacturer Part Number=S1751-46R, Supplier Part Number 1=952-1478-2-ND, Mounting Type="Surface Mount", Storage Location=ProtoPlace, Supplier="ECE Dept", Supplier 1=Digi-Key, Supplier 2=Farnell, Supplier Part Number 2=1826282, Type="PC Test Point"
U1: library part SE_ATSAM4S16BA-MU, "IC MCU 32BIT 512KB FLASH 64LQFP", Manufacturer=Atmel, Package / Case=64-LQFP, Supplier Part Number 1=ATSAM4S8BA-ANRCT-ND, Voltage - Supply (Vcc/Vdd)="1.62 V ~ 3.6 V", Code_JEDEC=MO-220VMMD-3, ComponentLink1Description="Manufacturer URL", ComponentLink1URL=http://www.atmel.com/, ComponentLink2Description="SAM4S Series Datasheet", ComponentLink2URL=http://www.atmel.com/dyn/resources/prod_documents/11100.pdf, ComponentLink3Description="SAM4S Series Summary", ComponentLink3URL=http://www.atmel.com/dyn/resources/prod_documents/11100S.pdf, Connectivity="I²C, IrDA, Memory Card, SPI, SSC, UART/USART, USB", Core Processor="ARM® Cortex®-M4", Core Size=32-Bit, Data Converters="A/D 11x12b, D/A 2x12b", Manufacturer Part Number=ATSAM4S8BA-ANR, Number of I/O=47, PackageDescription="64-Pin Quad Flat No-Lead (QFN) Sawn, 9 x 9 x 1.0 mm Body, 0.5 mm Pitch, Exposed Pad", PackageReference=64PS, PackageVersion="revJ, Jul-2007", Packaging="Cut Tape (CT)", Peripherals="Brown-out Detect/Reset, DMA, POR, PWM, WDT", Program Memory Size="512KB (512K x 8)", Program Memory Type=FLASH, RAM Size="128K x 8", Speed=120MHz, Supplier 1=Digi-Key
U2 U3: library part SV_CAT6219-330TDGT3, "IC REG LIN 3.3V 500MA TSOT23-5", Base Part Number=CAT6219, Current - Output=500mA, Package / Case="SOT-23-5 Thin, TSOT-23-5", Supplier Device Package=TSOT-23-5, Supplier Part Number=CAT6219-330TDGT3CT-ND, Voltage - Input (Max)=5.5V, Voltage - Output (Min/Fixed)=3.3V, Voltage Dropout (Max)="0.5V @ 500mA", ComponentLink1Description=http://www.onsemi.com/pub/Collateral/CAT6219-D.PDF, ComponentLink1URL=http://www.onsemi.com/pub/Collateral/CAT6219-D.PDF, Manufacturer Part Number=CAT6219-330TDGT3, Supplier=Digi-Key, Supplier 1=Digi-Key
U4: "9 axis IMU"
U5: library part ADP2302ARDZ-5.0-R7, "IC REG BUCK 5V 2A 8SOIC", Current - Output=2A, Frequency - Switching=700kHz, Supplier Part Number 1=ADP2302ARDZ-5.0-R7CT-ND, Voltage - Input (Max)=20V, Voltage - Output (Min/Fixed)=5V, Manufacturer_Part_Number=ADP2302ARDZ-5.0-R7, Output Type=Fixed, Supplier 1=Digi-Key, Type=DEV, Vendor="Analog Devices Inc"
U6: "1.8V - 5V level converter"
U7: library part NRF24, "nRF24 SMD Module", Warning="No power planes near or under device"
VR1: "JOYSTICK 10K OHM 2 AXIS TH", Manufacturer 1=SparkFun, Manufacturer Part Number 1=COM-09032, Supplier Part Number 1=1568-1526-ND, ComponentLink1Description=https://media.digikey.com/pdf/Data%20Sheets/Sparkfun%20PDFs/COM-09032_Web.pdf?src-supplier=Digi-Key, ComponentLink1URL=https://media.digikey.com/pdf/Data%20Sheets/Sparkfun%20PDFs/COM-09032_Web.pdf?src-supplier=Digi-Key, Pricing 1="1=3.95000 (USD)", RoHS=No, Stock 1=563, Supplier 1=Digi-Key
Y1: library part XT_CRYSTAL_12MHz_18pF, "CRYSTAL 12MHZ 18PF 6X3.5mm SMD", ESR (Equivalent Series Resistance)="60 Ohm", Frequency Stability=±50ppm, Frequency Tolerance=±30ppm, Load Capacitance=18pF, Manufacturer="CTS-Frequency Controls", Manufacturer Part Number=406C35D12M00000, Operating Mode=Fundamental, Operating Temperature="-20°C ~ 70°C", Package / Case="4-SMD, No Lead (DFN, LCC)", Supplier Part Number 1=CTX855CT-ND, Frequency=12MHz, Height="0.047\" (1.20mm)", Mounting Type="Surface Mount", Size / Dimension="0.236\" L x 0.138\" W (6.00mm x 3.50mm)", Supplier 1=Digi-Key

## Via types
v1: diameter 1, hole 0.5, Top Side to Bottom Side, 85 vias
v2: diameter 0.6, hole 0.3, Top Side to Bottom Side, 9 vias

## Nets (pads, with @x,y where several pads share a name; then routed paths per layer and width w, separated by ;. In a path a pad name is that pad's centre, name@x,y a point inside that pad or via, vN(x,y) a via of type N, cw(c..) or ccw(c..) an arc to the next point about the centre after c; other vN are vias at no path point)
3V3_RAD: C6.2 L3.2 TP7.1 U3.5 | length 21.3
  Top Side w0.3: TP7.1@13.7,82.6 13.7,83.1 TP7.1@14.2,82.6 ; C6.2 C6.2@17.15,82.45
  Top Side w0.5: L3.2 6,74.9 TP7.1@13.7,82.6 ; TP7.1@14.2,82.6 C6.2 ; C6.2@17.15,82.45 U3.5
5V: C2.2 C18.2 C19.2 C25.2 C26.2 H3.1 H7.1 L2.2 R16.2 TP3.1 U2.1 U2.3 U3.1 U3.3 U5.5 U6.1 | length 47.8
  Top Side w0.3: v1(12.1,6.8) C26.2 C25.2 L2.2 ; TP3.1 13.8,28.3 v1(13.8,27.1) 13.989,27.1 14.294,27.405 16.499,27.405 16.594,27.5 U5.5 ; v1(17.2,79.5) v1@17.45,79.75 ; C18.2@18.5,78.4 18.75,78.4 U3.1 ; U3.3@20.65,79.525 U3.3 ; v1(21.3,78.8) v1@21.3,78.875 ; C2.2@27.15,80.35 C2.2 ; v1(29.6,80.775) v1@29.6,80.8 ; U6.1 38.45,77.25 C19.2 38.8,77.1 v1(41.5,77.1) ; v1(51.6,62.4) 51.6,62.9
  Top Side w0.5: U2.1 C2.2@27.15,80.35 ; U2.3 25.9,82.5 27.9,82.5 v1@29.6,80.8 ; C2.2 28.925,80.1 v1(29.6,80.775) ; R16.2 51.6,62.9
  Top Side w0.6: v1@17.45,79.75 U3.1 ; U3.3@20.65,79.525 v1@21.3,78.875
  Bottom Side w0.6: v1(17.2,79.5) 20.6,79.5 v1(21.3,78.8) 23.275,80.775 v1(29.6,80.775)
BUTTON_A: S2.1 U1.44 | length 41.2
  Top Side w0.3: S2.1 8.6,35.15 8.6,39.024 10.638,41.062 25.462,41.062 33.75,49.35 U1.44
BUTTON_B: S3.1 U1.43 | length 36.4
  Top Side w0.3: S3.1 6.65,38.05 10.5,41.9 25.236,41.9 33.25,49.914 U1.43
BUZZER_EN: T1.1 U1.25 | length 35.3
  Top Side w0.3: v2(24.9,59.8) 24.95,59.75 U1.25 ; v1(37.9,72.6) 42.854,72.6 46.5,68.954 T1.1
  Bottom Side w0.3: v2(24.9,59.8) 24.9,60.764 27.6,63.464 27.6,66.4 33.8,72.6 v1(37.9,72.6)
D_N: H1.2 R4.1 | length 2.6
  Top Side w0.381: R4.1@57.75,50.65 58.94,51.84 59.441,51.84 59.45,51.85 H1.2
D_P: H1.3 R3.1 | length 2.7
  Top Side w0.381: R3.1@57.941,53.538 57.941,53.059 58.509,52.49 59.89,52.49 H1.3
GND: C1.1 C2.1 C3.1 C4.1 C5.1 C6.1 C7.1 C8.2 C9.1 C10.2 C11.1 C12.2 C13.2 C14.1 C15.1 C16.1 C18.1 C19.1 C20.2 C21.1 C22.1 C23.2 C24.1 C25.1 C26.1 D2.1 DL3.1 H1.5 H1.6 H2.5 H2.6 H3.3 H5.2 H5.10 H6.1 H6.3 J1.2 J2.2 R2.1 R7.1 R9.2 R10.1 R14.2 R17.1 R18.1 R21.1 S1.2 S2.2 S3.2 T1.2 TP6.1 U1.2 U1.17 U1.46 U1.60 U2.2 U3.2 U4.11 U4.18 U4.20 U5.7 U5.EPAD U6.2 U7.2 VR1.3 VR1.6 | length 175.8
  Top Side w0.2: U1.60 38.846,61.75 38.896,61.8 40.1,61.8 C14.1 41.377,60.523 41.877,60.523 v1(42.7,59.7) 42.7,59.553 43.323,58.93 43.323,58.777 C5.1 ; C16.1 40.5,64.3 v1(40.5,64) 42.2,64 C4.1 42.7,64.1 R7.1 46.45,64.1 T1.2 ; C13.2 42.6,53 43.3,52.3 v1(43.3,52.25) 46.65,52.25 47.5,53.1 TP6.1 ; v2(42.8,37.4) 42.316,36.916 41.616,36.916 41.35,36.65 41.35,36.15 41.565,35.935 U4.20 ; C5.1@43.8,58.6 C5.1@43.9,58.6 ; U4.18 43.993,38.993 44.5,39.5 v2(46,39.5) ; U4.11 48.435,35.935 48.6,36.1 48.6,38.592 48.1,39.092 v2(48.1,39.2)
  Top Side w0.3: v1(2.15,30.05) S2.2 S3.2 ; S1.2@2.2,42.25 S1.2 2.15,37.8 S3.2@2.35,37.6 ; S2.2@2.3,32.9 S2.2@2.35,32.95 ; v1(10,30.4) 11.25,30.4 R18.1@12.05,31.2 ; U7.2 10.629,66.471 C3.1 10.7,66.6 10.7,68.35 v1(10.8,68.45) ; v1(11.9,12.8) 11.9,10.8 C26.1 C25.1@13.8,10.6 ; C25.1 C25.1@14.2,10.7 ; v1(14.335,24.865) U5.7 ; H6.3 15.14,79.34 C6.1 19.025,81.2 19.7,80.525 U3.2 19.85,79.6 19.85,78.35 C18.1 21.4,76.8 v1(21.45,76.8) ; v1(19.5,64.3) 21.15,62.65 21,62.5 19.4,62.5 15.7,66.2 v1(15.7,69.3) J2.2 J1.2 ; v1@21.65,57.3 v1(22,57.3) C12.2 ; C24.1 25.7,21.5 v1(27.2,21.5) 27.2,20.2 D2.1 ; C1.1@24.3,78.8 24.3,80.4 25.2,81.3 U2.2 25.775,81.425 27.325,81.425 C2.1 ; C1.1 26.9,78.8 v1(28.1,77.6) ; R2.1 R2.1@24.9,53.05 ; v1(25.4,30.7) 26.4,29.7 R21.1 ; v1(26.3,65.7) 26.3,63.775 26.325,63.75 U1.17 ; v1(26.7,70.1) 27.2,70.1 C10.2 ; v1(30.6,72) 30.6,71.7 30.9,71.4 R9.2 R9.2@31.1,70.9 ; C20.2 31.377,79.023 31.45,79.096 R10.1 31.45,81.337 32.26,82.147 H3.3 H3.3@32.26,83.1 ; C8.2 32.5,70 v1(33.4,70.9) 34.7,70.9 35,71.2 C7.1 C15.1 ; U1.46 34.775,54.45 34.775,53.278 36.1,51.953 C11.1 36.75,51.8 36.85,51.7 37.7,51.7 v1(37.8,51.6) ; v2(35,67) 35,66.9 35.225,66.675 35.225,65.55 U1.2 ; U6.2 38.3,78.2 C19.1 38.95,78.85 40.45,78.85 v1(40.5,78.9) ; v1(39.6,83.1) 40.75,83.1 DL3.1 ; C21.1 C22.1 ; R17.1 C23.2 51.25,37.25 51.25,36.1 R14.2 51.65,36.1 v1(53.8,36.1) ; C22.1@51.25,34.3 R14.2@51.25,35.8 ; VR1.6 60.3,18.2 62.1,20 62.1,22.54 H5.2 ; H1.6@60.4,50 61.6,50 62.6,51 62.6,51.5 H1.6@62.6,53 ; H1.5@60.4,53.8 H1.6@60.4,55
  Top Side w0.5: R2.1@24.9,53.05 v1(24.9,54.6)
  other v1: 19,25.5
HORIZONTAL: U1.11 VR1.2 | length 72
  Top Side w0.3: v2(30.4,68) 30.75,67.65 U1.11
  Bottom Side w0.3: v2(30.4,68) 30.4,61.9 23.3,54.8 23.3,41.5 32.3,32.5 32.3,18.7 VR1.2
IMU_SEL: H5.9 R11.1 U1.52 U4.22 | length 53
  Top Side w0.2: R11.1 36.4,34.8 36.735,35.135 41,35.135 ; U1.52 38.863,57.75 41.2,55.413 41.2,51.7 42.4,50.5 45.5,50.5 48.1,47.9 48.1,41.533 ; U4.22 41,35.135 ; H5.9 56.913,41.533 48.1,41.533 ; 41,35.135 41,36.9 45.633,41.533 48.1,41.533
LED_OUT: H3.2 U6.3 | length 4.7
  Top Side w0.3: H3.2@34.8,83.1 34.8,81.05 U6.3
LED_STRIP: U1.23
LED_STRIP_EN: U1.38 U6.4 | length 40.3
  Top Side w0.3: v1(30.6,52) 30.725,52.125 30.725,54.45 U1.38 ; U6.4 v1(34.3,80.2)
  Bottom Side w0.3: v1(30.6,52) 41.4,62.8 41.4,74.9 36.1,80.2 v1(34.3,80.2)
MISO: U1.27 U7.7 | length 40.2
  Top Side w0.3: v1(1.3,69) 1.336,69 4.271,66.065 U7.7 ; v1(19.3,56.6) 19.6,56.3 23.274,56.3 25.724,58.75 U1.27
  Bottom Side w0.3: v1(1.3,69) 1.7,69 6.4,64.3 16.6,64.3 18.7,62.2 18.7,57.2 v1(19.3,56.6)
MOSI: U1.22 U7.6 | length 37.4
  Top Side w0.3: v1(1.5,70.8) 1.9,70.8 5.543,67.157 U7.6 ; v1(20.6,61.1) 20.725,61.225 26.45,61.225 U1.22
  Bottom Side w0.3: v1(1.5,70.8) 7.5,64.8 16.9,64.8 v1(20.6,61.1)
NetC3_2: C3.2 R15.1 U7.1 | length 5.9
  Top Side w0.3: U7.1 U7.1@12,64.5 ; C3.2 C3.2@12.2,66.7
  Top Side w0.5: U7.1@12,64.5 C3.2 ; C3.2@12.2,66.7 R15.1
NetC4_2: C4.2 U1.62 Y1.3 | length 12.2
  Top Side w0.2: U1.62 37.532,62.757 38.65,62.757 38.793,62.9 C4.2 43.2,62.9 43.45,63.15 45.998,63.15 46.071,63.077 48.323,63.077 Y1.3
NetC5_2: C5.2 U1.61 Y1.1 | length 10.1
  Top Side w0.3: U1.61 38.85,62.25 38.9,62.3 41.1,62.3 42.012,61.388 43.012,61.388 44.6,59.8 Y1.1 45.3,59.3 C5.2
NetC8_1: C8.1 C10.1 C12.1 C13.1 L1.2 U1.8 U1.12 U1.24 U1.54 | length 96.8
  Top Side w0.25: U1.54@37.55,58.725 38.913,58.725 42.225,55.413 C13.1@42.387,55.413
  Top Side w0.3: v1(20.1,59.5) 21.2,59.5 C12.1 22.05,60.3 22.35,60.6 25.374,60.6 25.724,60.25 U1.24 ; v1(26.4,68.1) 27.8,68.1 C10.1 28,67.775 28.225,68 29.2,68 30.25,66.95 U1.12 ; v1(29.2,72.9) 29.5,73.2 30.6,73.2 31.7,72.1 31.7,68.6 C8.1 ; U1.8 32.25,66.912 32.5,67.162 C8.1 ; v1(33.8,69.1) C8.1 ; U1.54 U1.54@37.55,58.725 ; L1.2 38.5,68.6 v1(40.2,68.6) 42.166,70.566 42.166,71.366 v1(42.3,71.5) ; v1(42.3,73.5) 43.5,73.5 47.7,69.3 v1(52.3,69.3) ; C13.1@42.387,55.413 C13.1 43.3,55.2 43.9,54.6 v1(43.9,54.1)
  Bottom Side w0.3: v1(20.1,59.5) 20.4,59.5 21.801,60.901 23.633,60.901 25.05,62.319 25.05,66.218 26.4,67.568 v1(26.4,68.1) 26.589,68.1 27.9,69.411 27.9,71.6 v1(29.2,72.9) ; v1(33.8,69.1) 39.7,69.1 v1(40.2,68.6) ; v1(42.3,71.5) v1(42.3,73.5) ; v1(43.9,54.1) 43.9,56.99 52.3,65.39 v1(52.3,69.3)
NetC16_2: C16.2 C17.2 L1.1 U1.64 | length 5.6
  Top Side w0.2: U1.64 38.3,64.525 L1.1 38.4,65.5 C16.2 40.4,65.6 C17.2
NetC17_1: C17.1 R7.2 | length 2.3
  Top Side w0.2: C17.1 44,67 R7.2
NetC23_1: C23.1 U4.10 | length 3.8
  Top Side w0.2: U4.10 48.53,35.535 49.3,36.305 49.3,37.2 C23.1
NetC24_2: C24.2 D1.1 Q1.2 R19.2 R20.2 U5.2 | length 41.6
  Top Side w0.3: Q1.2 15.85,36.55 D1.1@15.975,36.425 ; U5.2 23.935,24.865 C24.2 26.1,24.8 27.6,26.3 27.6,31.6 22.775,36.425 16.1,36.425 D1.1@15.975,36.425 ; R19.2 23.4,28.75 R20.2 23.35,28.8 17.302,34.848 17.302,35.098 16.1,36.3 D1.1@15.975,36.425
NetC27_1: C27.1 U5.1 | length 2.9
  Top Side w0.3: C27.1 20.7,22 21.311,22.611 U5.1
NetC27_2: C27.2 D2.2 L2.1 U5.8 | length 19.4
  Top Side w0.3: U5.8 16.6,23.506 16.6,22.4 17,22 C27.2 17.95,21.75 D2.2 17.95,16.85 L2.1
NetD1_2: D1.2 Q1.1 R18.2 | length 6.4
  Top Side w0.3: R18.2 12.1,33.4 12.5,33.8 Q1.1 13.9,33.25 15.95,33.25 D1.2@16.1,33.1
NetDL1_1: DL1.1 R5.1 | length 1.4
  Top Side w0.3: DL1.1@43.9,81.4 45.2,81.4 R5.1
NetDL2_1: DL2.1 R6.1 | length 1.4
  Top Side w0.3: DL2.1 R6.1
NetDL3_2: DL3.2 R22.2 | length 1.5
  Top Side w0.3: DL3.2 41.15,81.1 R22.2@42.3,81.1
NetF1_1: F1.1 Q1.3 | length 6.3
  Top Side w0.3: Q1.3@10.4,35.7 Q1.3 10.4,35.5 9.676,35.5 9.45,35.726 9.45,38.4 10.35,39.3 F1.1
NetH5_7: H5.7 R17.2 | length 10.8
  Top Side w0.2: R17.2 49.5,39.4 50.3,40.2 53.9,40.2 55.66,38.44 H5.7
NetH7_2: H7.2 R16.1 T1.3 | length 11.4
  Top Side w0.3: T1.3 49.4,65 R16.1 54.05,69.65 55.55,69.65 56.2,70.3 H7.2
NetJ1_1: J1.1 U1.19 | length 6.5
  Top Side w0.3: J1.1 22.428,66.756 23.011,66.173 23.011,66.045 24.85,64.206 24.85,63.186 25.286,62.75 U1.19
NetJ2_1: J2.1 U1.20 | length 10.1
  Top Side w0.3: J2.1 19.05,66.756 21.006,64.8 23.5,64.8 24.4,63.9 24.4,63 25.15,62.25 U1.20
NetL3_1: L3.1 R15.2 | length 1.7
  Top Side w0.3: R15.2@10.6,70.3 R15.2
  Top Side w0.5: L3.1 R15.2@10.6,70.3
NetR3_2: R3.2 U1.57 | length 20.4
  Top Side w0.2: U1.57 39.05,60.25 41.85,57.45 49.75,57.45 53.4,53.8 R3.2
NetR4_2: R4.2 U1.56 | length 21.1
  Top Side w0.2: U1.56 39.055,59.75 41.705,57.1 47.7,57.1 53.6,51.2 R4.2
NetR8_1: R8.1 R9.1 U1.10 | length 5.3
  Top Side w0.3: R8.1 R9.1 30.9,68.5 31.25,68.15 U1.10
NetR10_2: R10.2 U6.5 | length 3.5
  Top Side w0.3: R10.2@32.95,80.7 32.95,78.75 33.5,78.2 U6.5
NetR14_1: R14.1 U4.9 | length 3.1
  Top Side w0.2: U4.9 49.185,35.135 R14.1
NetR19_1: R19.1 R21.2 U5.3 | length 5.6
  Top Side w0.3: U5.3 21.346,26.1 22.6,26.1 23.75,27.25 R19.1 R21.2
NetR20_1: R20.1 U5.4 | length 1.5
  Top Side w0.3: U5.4 21.742,27.836 21.742,28.592 R20.1
NetTP2_1: TP2.1 U1.55 | length 10.1
  Top Side w0.3: U1.55 37.55,59.225 39.014,59.225 42.163,56.077 43.323,56.077 44.5,54.9 TP2.1
nRST: H2.1 S1.1 U1.39 | length 53.8
  Top Side w0.3: S1.1 9.3,42.2 10.3,43.2 23.55,43.2 v1(27.3,46.95) ; v1(30.1,49.8) 31.7,51.4 31.7,52.5 31.25,52.95 U1.39 ; v1(49.1,48.1) 49.48,47.72 H2.1
  Bottom Side w0.3: v1(27.3,46.95) 27.3,47 v1(30.1,49.8) 31.9,48 49,48 v1(49.1,48.1)
PA4: U1.36
PA6: U1.34
PA23: U1.15
PA27: 
PB0: U1.3
PB1: U1.4
PB2: U1.5
PB3: U1.6
PB13: U1.59
PB14: U1.63
RADIO_CLK: U1.21 U7.5 | length 35
  Top Side w0.3: v1(4.3,70.8) 4.3,69.464 6.814,66.949 U7.5 ; v1(23.9,62.3) 24.45,61.75 U1.21
  Bottom Side w0.3: v1(4.3,70.8) 4.3,68.9 7.7,65.5 17,65.5 20.6,61.9 21.3,61.9 21.5,61.7 23.156,61.7 23.756,62.3 v1(23.9,62.3)
RADIO_EN: U1.42 U7.3 | length 49.1
  Top Side w0.3: v1(8.8,68.1) 8.8,67.8 9.357,67.243 U7.3 ; v1(13.5,66.4) 13.5,66.1 17.2,62.4 17.2,49.2 18.1,48.3 31,48.3 32.75,50.05 U1.42
  Bottom Side w0.3: v1(8.8,68.1) 10.5,66.4 v1(13.5,66.4)
RADIO_INT: U1.37 U7.8 | length 48.8
  Top Side w0.3: v1(1.4,67.1) 2.6,67.1 3,66.7 U7.8 ; v1(21,49.9) 28.131,49.9 29.7,51.469 29.7,52.726 30.25,53.276 U1.37
  Bottom Side w0.3: v1(1.4,67.1) 4.9,63.6 16.5,63.6 18.1,62 18.1,52.8 v1(21,49.9)
RADIO_SEL: U1.41 U7.4 | length 52.6
  Top Side w0.3: v1(7,68.4) 7,67.9 8.086,66.814 U7.4 ; v1(14.4,67.7) 14.4,66.1 17.9,62.6 17.9,49.7 18.8,48.8 30.7,48.8 32.25,50.35 U1.41
  Bottom Side w0.3: v1(7,68.4) 7.134,68.534 7.923,68.534 9.589,70.2 11.9,70.2 v1(14.4,67.7)
STATUS0: R5.2 U1.48 | length 35.9
  Top Side w0.2: U1.48 35.75,53.842 35.773,53.819 37.119,53.819 v1(38,54.7) ; v1(44.1,78.4) 46.2,80.5 46.2,82.1 R5.2
  Bottom Side w0.2: v1(38,54.7) 40.419,57.119 41.371,57.119 44.1,59.848 v1(44.1,78.4)
STATUS1: R6.2 U1.47 | length 42.1
  Top Side w0.3: U1.47 35.25,53.44 35.69,53 v1(38.8,53) ; R6.2 50,83.1 v1(51.2,81.9)
  Bottom Side w0.3: v1(38.8,53) 51.2,65.4 v1(51.2,81.9)
SWCLK: H2.2 H5.3 R12.1 U1.53 U4.23 | length 74.7
  Top Side w0.2: U1.53 37.535,58.24 38.868,58.24 41.587,55.521 41.587,51.813 42.5,50.9 47.7,50.9 51.5,47.1 51.5,45.85 H2.2 v1(52.17,43.83) v1@52.2,43.8 ; U4.23 39.085,34.735 R12.1 38.35,33.9 39.083,33.9 39.2,33.783 39.2,32.1 41,30.3 56.88,30.3 H5.3
  Bottom Side w0.2: v1(52.17,43.83) 55.499,40.501 55.499,32.7 58.744,29.455 58.744,28.436 H5.3
SWDIO: H2.4 H5.4 R13.1 U1.51 U4.24 | length 65.8
  Top Side w0.2: U1.51 38.85,57.25 40.85,55.25 40.85,51.555 42.255,50.15 45.05,50.15 45.865,49.335 45.865,45.749 46.663,44.951 46.663,44.107 H2.4 46.93,43.83 44.5,41.4 v1(43.2,41.4) ; R13.1@40.3,33.7 40.3,33.95 40.685,34.335 U4.24 42.793,32.94 44.913,30.82 46.18,30.82 H5.4 56.92,32.8 v1(53.8,32.8)
  Bottom Side w0.2: v1(43.2,41.4) 46.015,38.585 48.015,38.585 v1(53.8,32.8)
USB_DETECT: R1.1 R2.2 U1.35 | length 6.6
  Top Side w0.2: R1.1@26,51.15 R1.1
  Top Side w0.35: R1.1 27.542,52.592 28.492,52.592 29.25,53.35 U1.35
  Top Side w0.5: R2.2 R1.1@26,51.15
VBATT: F1.2 H6.2 R8.2 TP4.1 | length 20.6
  Top Side w0.3: F1.2 17.1,39.3 v1(17.2,39.2) ; H6.2 H6.2@14.88,76.72 ; v1(17.3,75.949) v1@17.401,75.949 ; TP4.1@18.698,74.952 TP4.1@19.048,74.602
  Top Side w0.5: H6.2@14.88,76.72 16.528,76.72 v1(17.3,75.949) ; v1@17.401,75.949 TP4.1 26.325,73.775 R8.2
VBATT_DISABLE: R22.1 U1.26 | length 38.6
  Top Side w0.3: v2(23.3,59.8) 24.3,58.8 24.8,58.8 25.225,59.225 U1.26@26.45,59.225 ; v1(38.2,74.1) 40,74.1 43.05,77.15 43.05,81.7 R22.1
  Bottom Side w0.3: v2(23.3,59.8) 25.5,62 25.5,66.031 26.569,67.1 27.2,67.1 34.2,74.1 v1(38.2,74.1)
VBUS: H1.1 R1.2 TP5.1 | length 44.3
  Top Side w0.3: v1(53.35,55.9) v1@53.539,55.9
  Top Side w0.5: R1.2 27.55,51.2 27.65,51.3 27.75,51.3 28.154,51.704 28.804,51.704 v1(28.9,51.8) ; v1@53.539,55.9 54.539,56.9 TP5.1 ; TP5.1@56.7,56.6 60.8,56.6 61.1,56.3 61.1,51.4 60.9,51.2 H1.1@60.4,51.2
  Bottom Side w0.5: v1(28.9,51.8) 29.4,51.8 32.4,48.8 46.25,48.8 v1(53.35,55.9)
VDDIO: C1.2 C7.2 C9.2 C11.2 C14.2 C15.2 C20.1 C21.2 C22.2 DL1.2 DL2.2 H2.7 H2.8 H5.1 R11.2 R12.2 R13.2 TP1.1 U1.1 U1.7 U1.18 U1.45 U1.58 U2.5 U4.8 U4.13 U6.6 VR1.1 VR1.4 | length 125.9
  Top Side w0.2: U4.13 U4.13@45.993,37.7 ; v2@46.97,37.7 47.17,37.5 v2(47.185,37.5) ; U4.8 48.565,34.735 48.9,34.4 C22.2
  Top Side w0.3: C9.2 23.2,63.3 v1(23.2,63.9) ; U2.5@22.9,80.3 U2.5 ; v1(24.547,66.846) 24.547,65.153 25.3,64.4 25.3,63.386 25.436,63.25 U1.18 ; C20.1 34.15,77.4 U6.6 ; U1.7 32.75,66.55 C7.2@35.7,69.5 ; U1.45 34.25,53.167 34.7,52.717 C11.2 36,50.5 v1(36,50.25) ; C7.2 C7.2@35.7,69.5 ; U1.1 35.75,67.15 v1(36.4,67.8) ; R11.2 R12.2 38.4,32.45 38.6,32.25 38.6,31.462 39.1,30.962 v1(39.1,30.7) 48.3,21.5 VR1.4 ; U1.58 37.55,60.775 38.625,60.775 38.75,60.9 39.4,60.9 C14.2@39.25,61.05 ; C15.2 37.5,69.8 37.1,69.4 37.1,68.5 v1(36.4,67.8) ; C14.2 39.4,61.05 40.65,59.8 v1(40.7,59.8) ; R13.2 R13.2@40.7,32.15 ; VR1.1 45.6,6.7 48.3,9.4 VR1.4 ; v1@42.9,84 43,83.9 v1(43.2,83.9) ; DL1.2 DL1.2@44.034,82.734 ; U4.13@45.993,37.7 v2@46.97,37.7 ; C21.2 C22.2 ; H5.1 53.3,23.2 VR1.4 ; C7.2@35.7,69.5 35.7,68.5 v1(36.4,67.8)
  Top Side w0.4: v1(43.2,83.9) 44.034,83.9 ; DL1.2@44.034,82.734 44.034,83.9 ; DL2.2 46.066,84.134 44.268,84.134 44.034,83.9
  Top Side w0.5: C1.2@22.9,78.6 U2.5@22.9,80.3 ; C1.2 23,77.4 TP1.1@24.1,76.3 ; TP1.1 27.2,75.7 v1(28.4,74.5) ; v1@28.45,74.45 C20.1 ; R13.2@40.7,32.15 41.55,31.3 v1(42.5,31.3) ; v1(47.2,32.1) 48,32.1 48.5,32.6 C21.2
  Bottom Side w0.2: v2(47.185,37.5) 47.185,37.585 v2@47.25,37.65 ; v1(47.2,32.1) v1@47.25,32.15
  Bottom Side w0.3: v1(29,83.7) 29.266,83.966 v1@29.334,83.966 ; v1@43.116,83.916 43.132,83.9 v1(43.2,83.9)
  Bottom Side w0.4: v1@29.334,83.966 43.134,83.966 v1(43.2,83.9)
VERTICAL: U1.14 VR1.5 | length 69.4
  Top Side w0.3: v1(22.3,39.7) v1(27.5,39.7) ; v2(29.2,67) 29.225,66.975 29.225,65.55 U1.14
  Bottom Side w0.3: v1(22.3,39.7) 22.3,55.5 29.2,62.4 v2(29.2,67) ; v1(27.5,39.7) 44.6,22.6 46.9,22.6 50.8,18.7 VR1.5
pads on no net: H1.4 H2.3 H2.9 H2.10 H5.5 H5.6 H5.8 U1.9 U1.13 U1.16 U1.28 U1.29 U1.30 U1.31 U1.32 U1.33 U1.40 U1.49 U1.50 U2.4 U3.4 U4.1 U4.2 U4.3 U4.4 U4.5 U4.6 U4.7 U4.12 U4.14 U4.15 U4.16 U4.17 U4.19 U4.21 U5.6 VR1.7 VR1.8 VR1.9 VR1.10 VR1.11 VR1.12 VR1.13 VR1.14 Y1.2 Y1.4
copper on no net:
  other v1: 44.993,35.335

## Polygon pours and split planes (outlines as drawn)
GND on Top Side "NONET_L01_P007" (solid, pour order 7): 63.8,84.8 63.7,84.7 63.7,0.4 -0.1,0.4 0,0.5 0,85
GND on Bottom Side "NONET_L04_P009" (solid, remove dead copper, pour order 9): -0.1,84.9 63.8,84.9 63.9,85 63.9,-0.2 0,-0.2 -0.1,-0.1
GND on Ground Plane (split plane): 63.49,0.51 0.51,0.51 0.51,44.5 15.38,44.5 16.8,45.046 16.8,62.787 0.51,63.018 0.51,84.49 63.49,84.49
VBATT on Power Plane (split plane): 22.208,83.192 22.18,83.15 22.171,83.1 22.171,59.6 22.18,59.55 22.208,59.508 23.771,57.946 23.771,34.2 23.771,34.124 20.476,30.829 11.359,30.829 11.309,30.82 11.267,30.792 8.205,27.729 0.51,27.729 0.51,44.5 14.83,44.5 16.295,44.776 16.8,47.3 16.8,62.807 0.51,63.105 0.51,84.49 23.506,84.49
5V on Power Plane (split plane): 63.49,0.51 0.51,0.51 0.51,27.471 8.259,27.471 8.309,27.48 8.351,27.508 11.413,30.571 20.529,30.571 20.579,30.58 20.621,30.608 23.9,33.887 29.879,27.908 29.921,27.88 29.971,27.871 49.5,27.871 49.55,27.88 49.592,27.908 52.092,30.408 52.12,30.45 52.129,30.5 52.129,42.8 52.12,42.85 52.092,42.892 46.729,48.254 46.729,49.029 46.729,63.9 46.72,63.95 46.692,63.992 40.692,69.992 40.65,70.02 40.6,70.029 35.854,70.029 28.179,77.704 28.179,81.096 29.692,82.608 31.573,84.49 63.49,84.49
VDDIO on Power Plane (split plane): 29.508,82.792 27.958,81.242 27.93,81.2 27.921,81.15 27.921,77.65 27.93,77.6 27.958,77.558 35.708,69.808 35.75,69.78 35.8,69.771 40.546,69.771 46.471,63.846 46.471,49.029 46.471,48.2 46.48,48.15 46.508,48.108 51.871,42.746 51.871,30.554 49.446,28.129 30.024,28.129 24.029,34.124 24.029,34.5 24.029,58 24.02,58.05 23.992,58.092 22.429,59.654 22.429,83.046 23.873,84.49 31.206,84.49

## Other copper
Top Side:
  region: 14.5,55
  region: 15,56.1
  pour cut-out: 0.6,62.69 0.6,44.5 16.1,44.5 16.8,45.2 16.8,62.493
  region: 10.3,54.9
  text "Wacky Hat - Group 12 - wpj19 & fph17" at 10.3,1.8 h0.6
Bottom Side:
  pour cut-out: 0.4,63 0.4,46.616 0.6,46.416 16.5,46.416 16.5,62.8
Ground Plane (plane layer: these items are gaps in the copper):
  region: 19.3,53.6
  pour cut-out: 16.8,62.787 16.8,45.046 15.38,44.5 0,44.5 0,63.025
Power Plane (plane layer: these items are gaps in the copper):
  region: 15.3,47
  region: 14.5,47 14.5,48
  pour cut-out: 16.8,62.807 16.8,47.3 16.295,44.776 14.83,44.5 0.5,44.5 0.5,63.105
  region: 1,63.7